# Altium PCB Main.PcbDoc (part 1 of 2)
Units mil, origin at the board's own origin, x right, y up, seen from the top; angles counter-clockwise.
Board outline 5000 x 4200 mil, 4 copper layers (Top Layer, Gnd 1, Power, Gnd 2), stack 62.4 mil thick; 162 components, 132 nets, 664 pads, 567 vias.
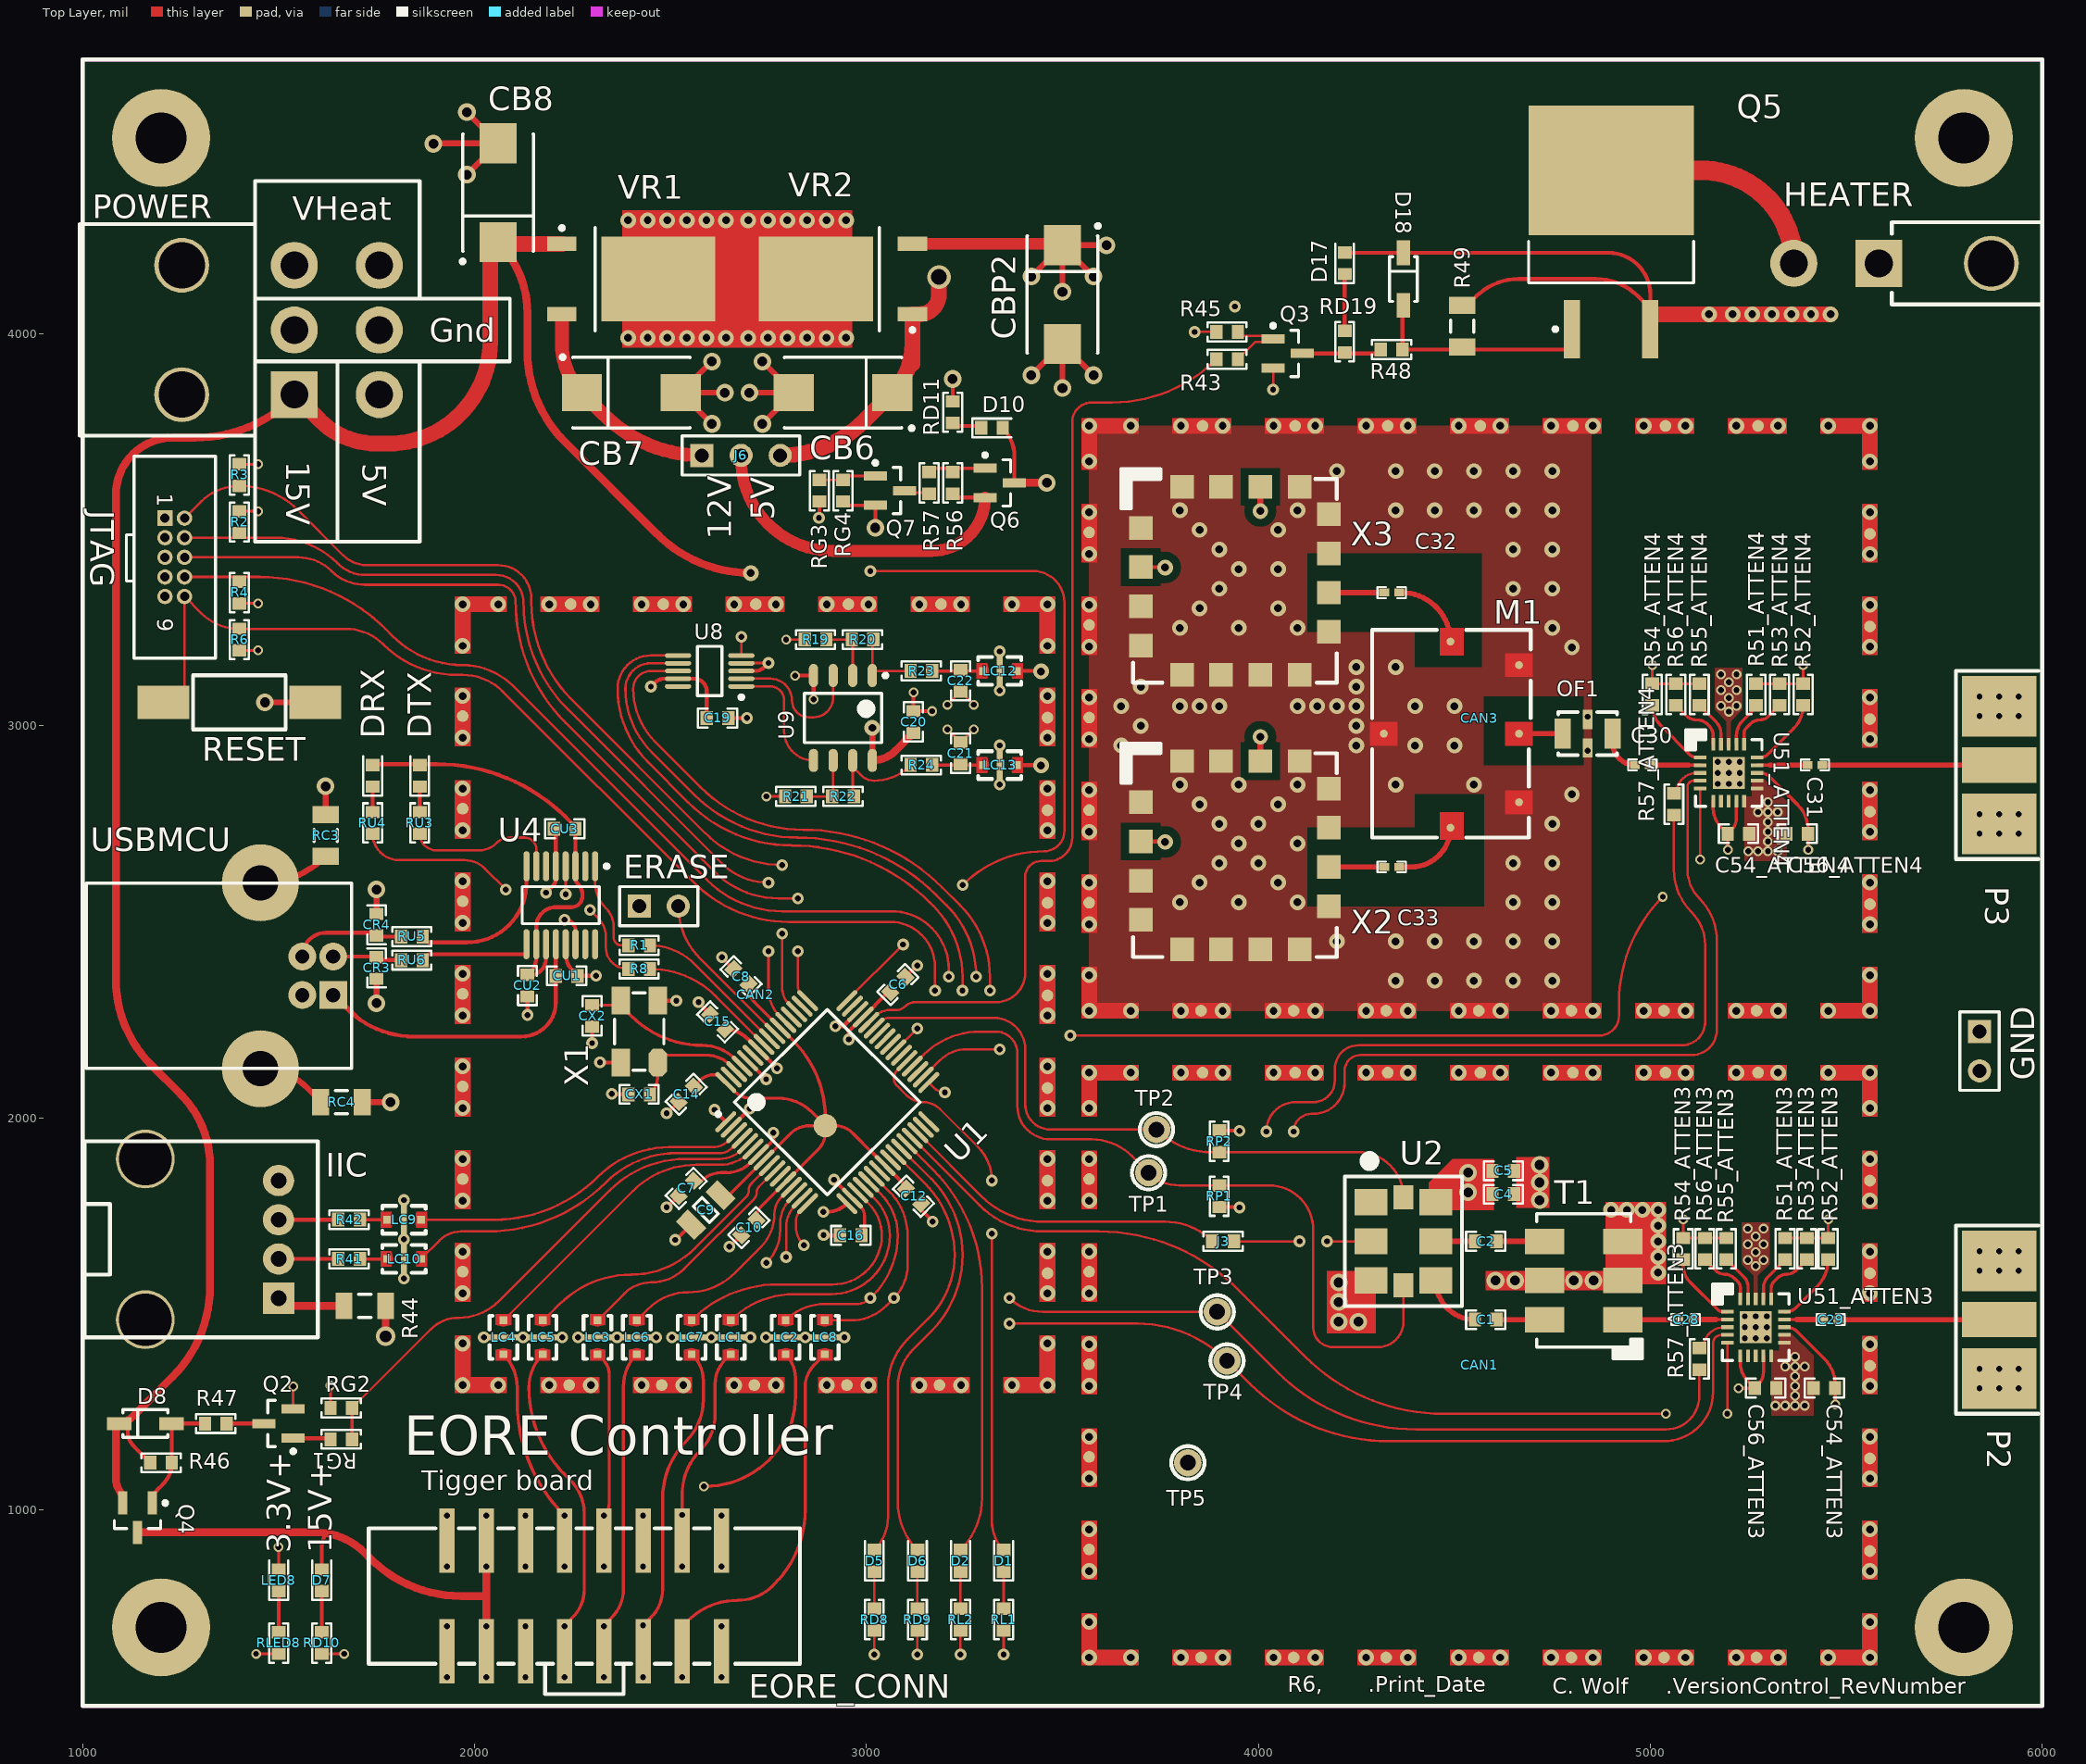
[diagram p0: Top Layer view]
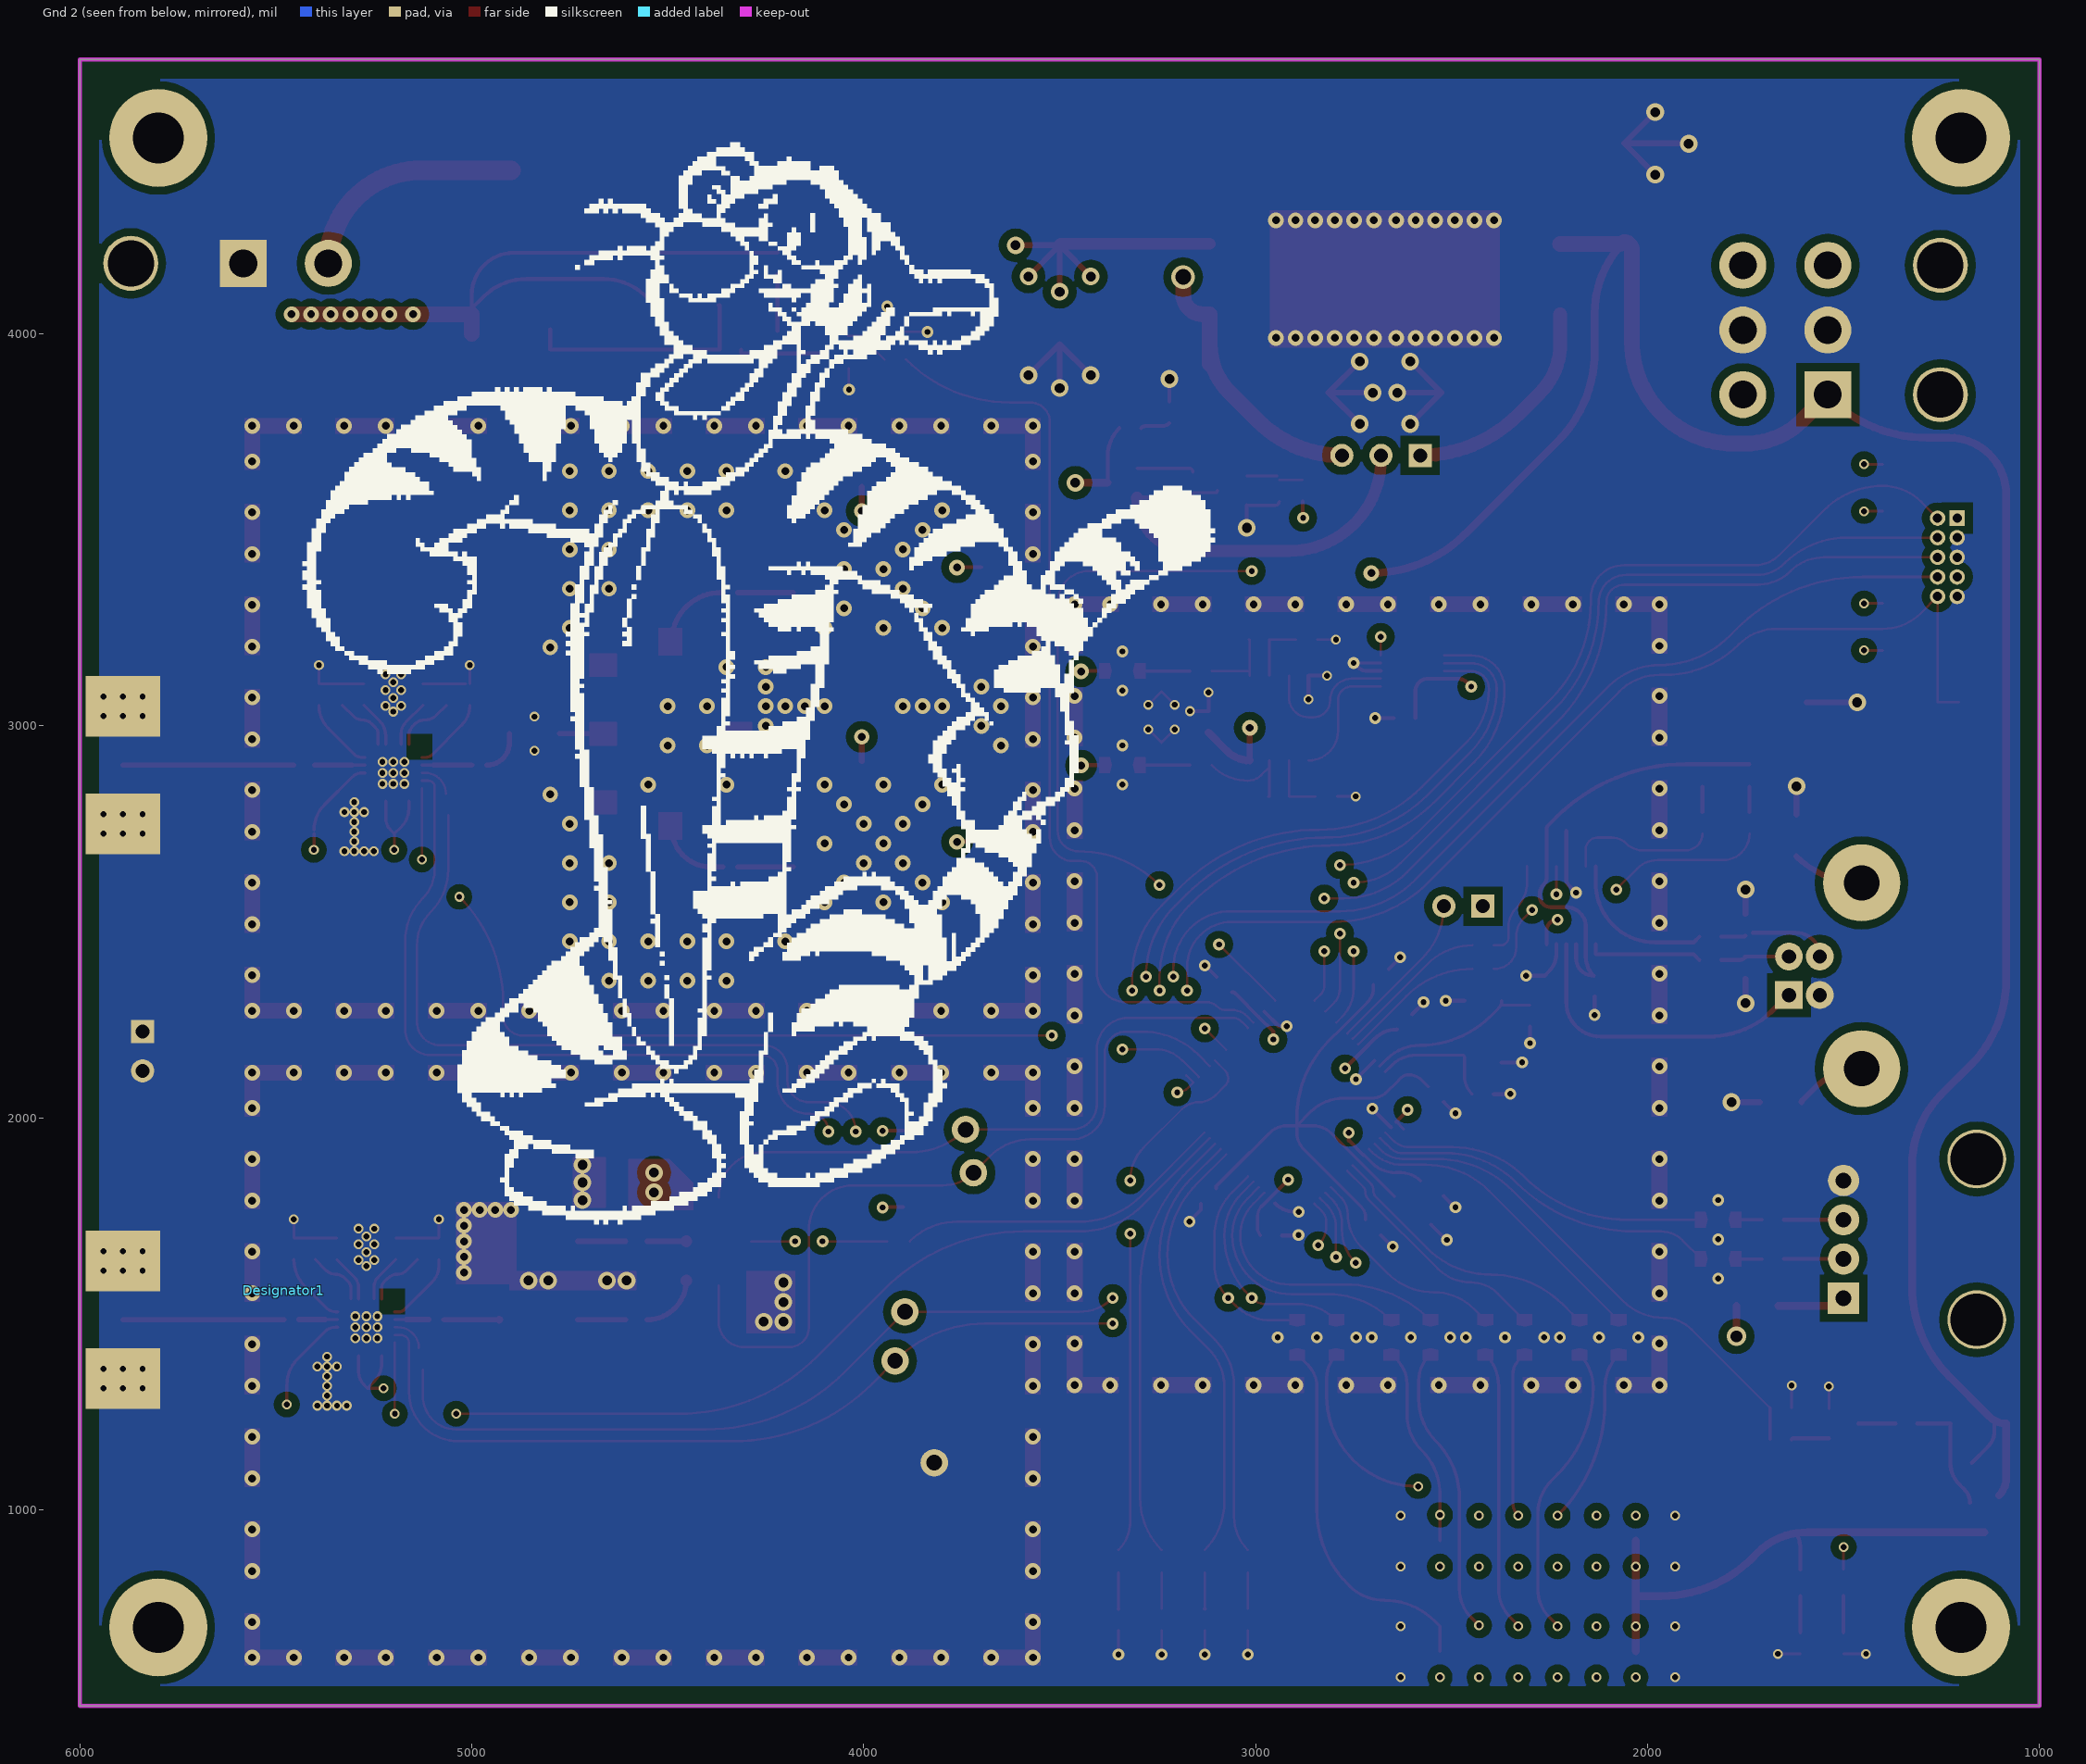
[diagram p1: Gnd 2 view, seen from below]
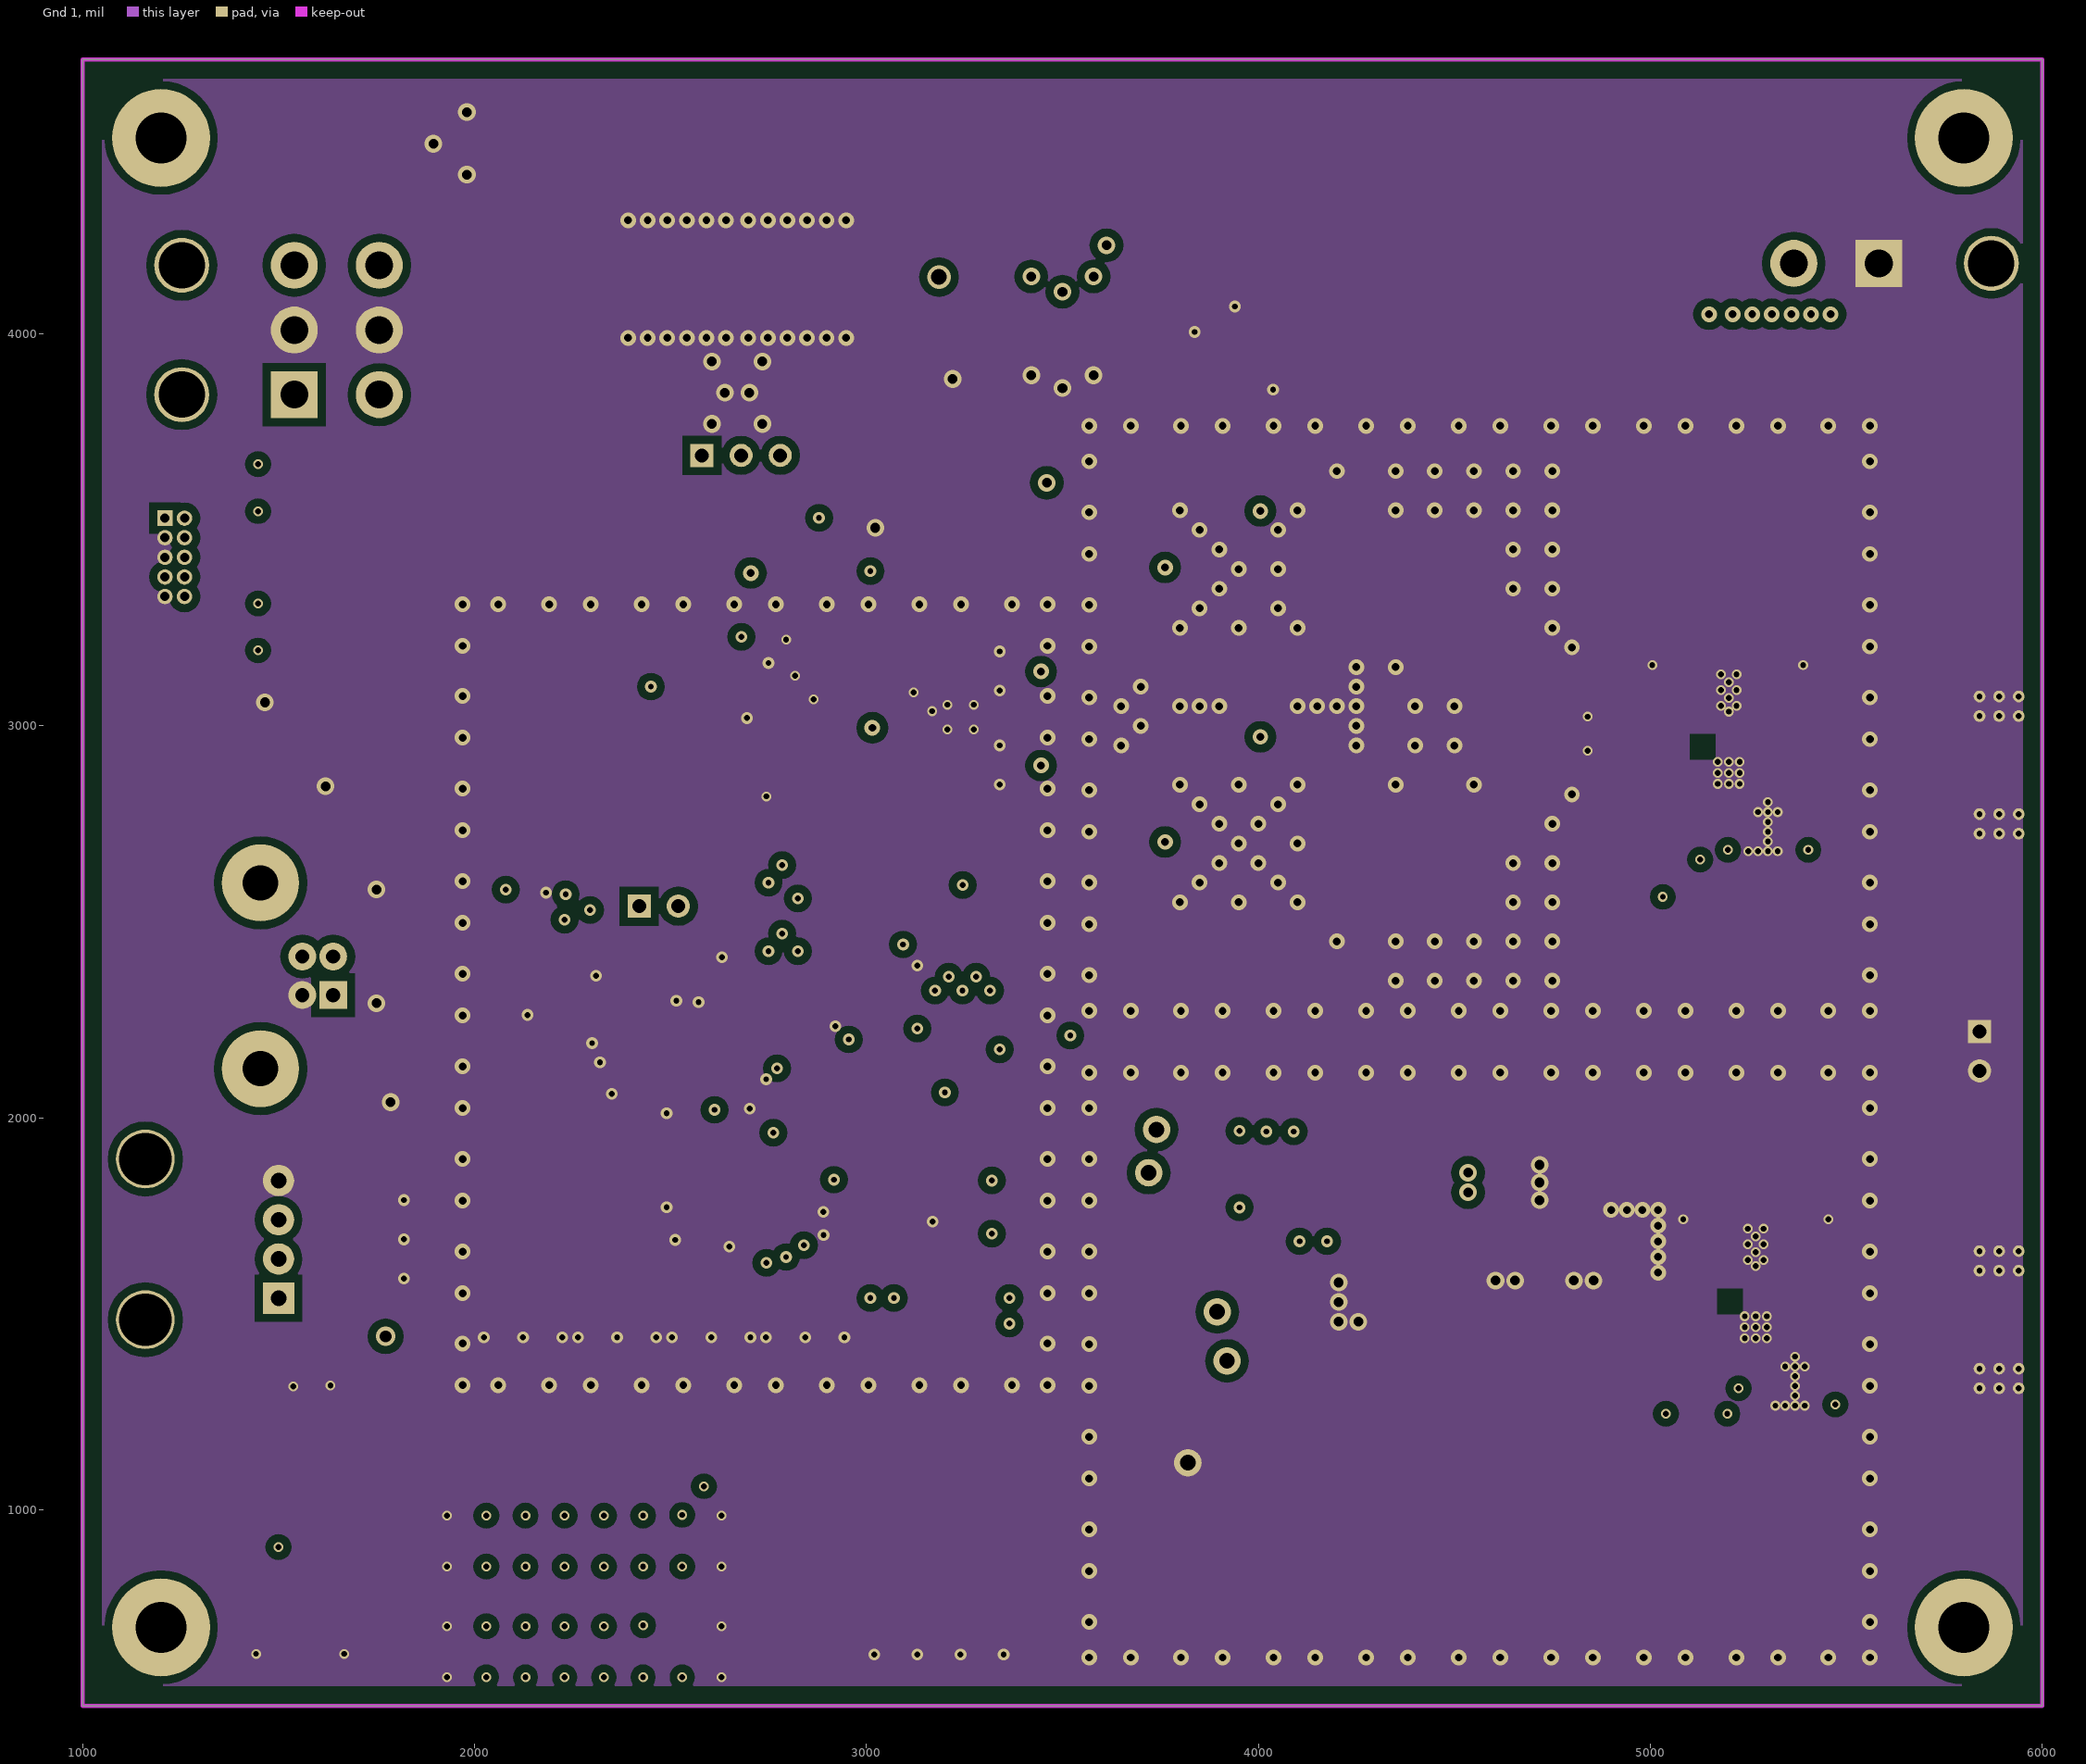
[diagram p2: Gnd 1]
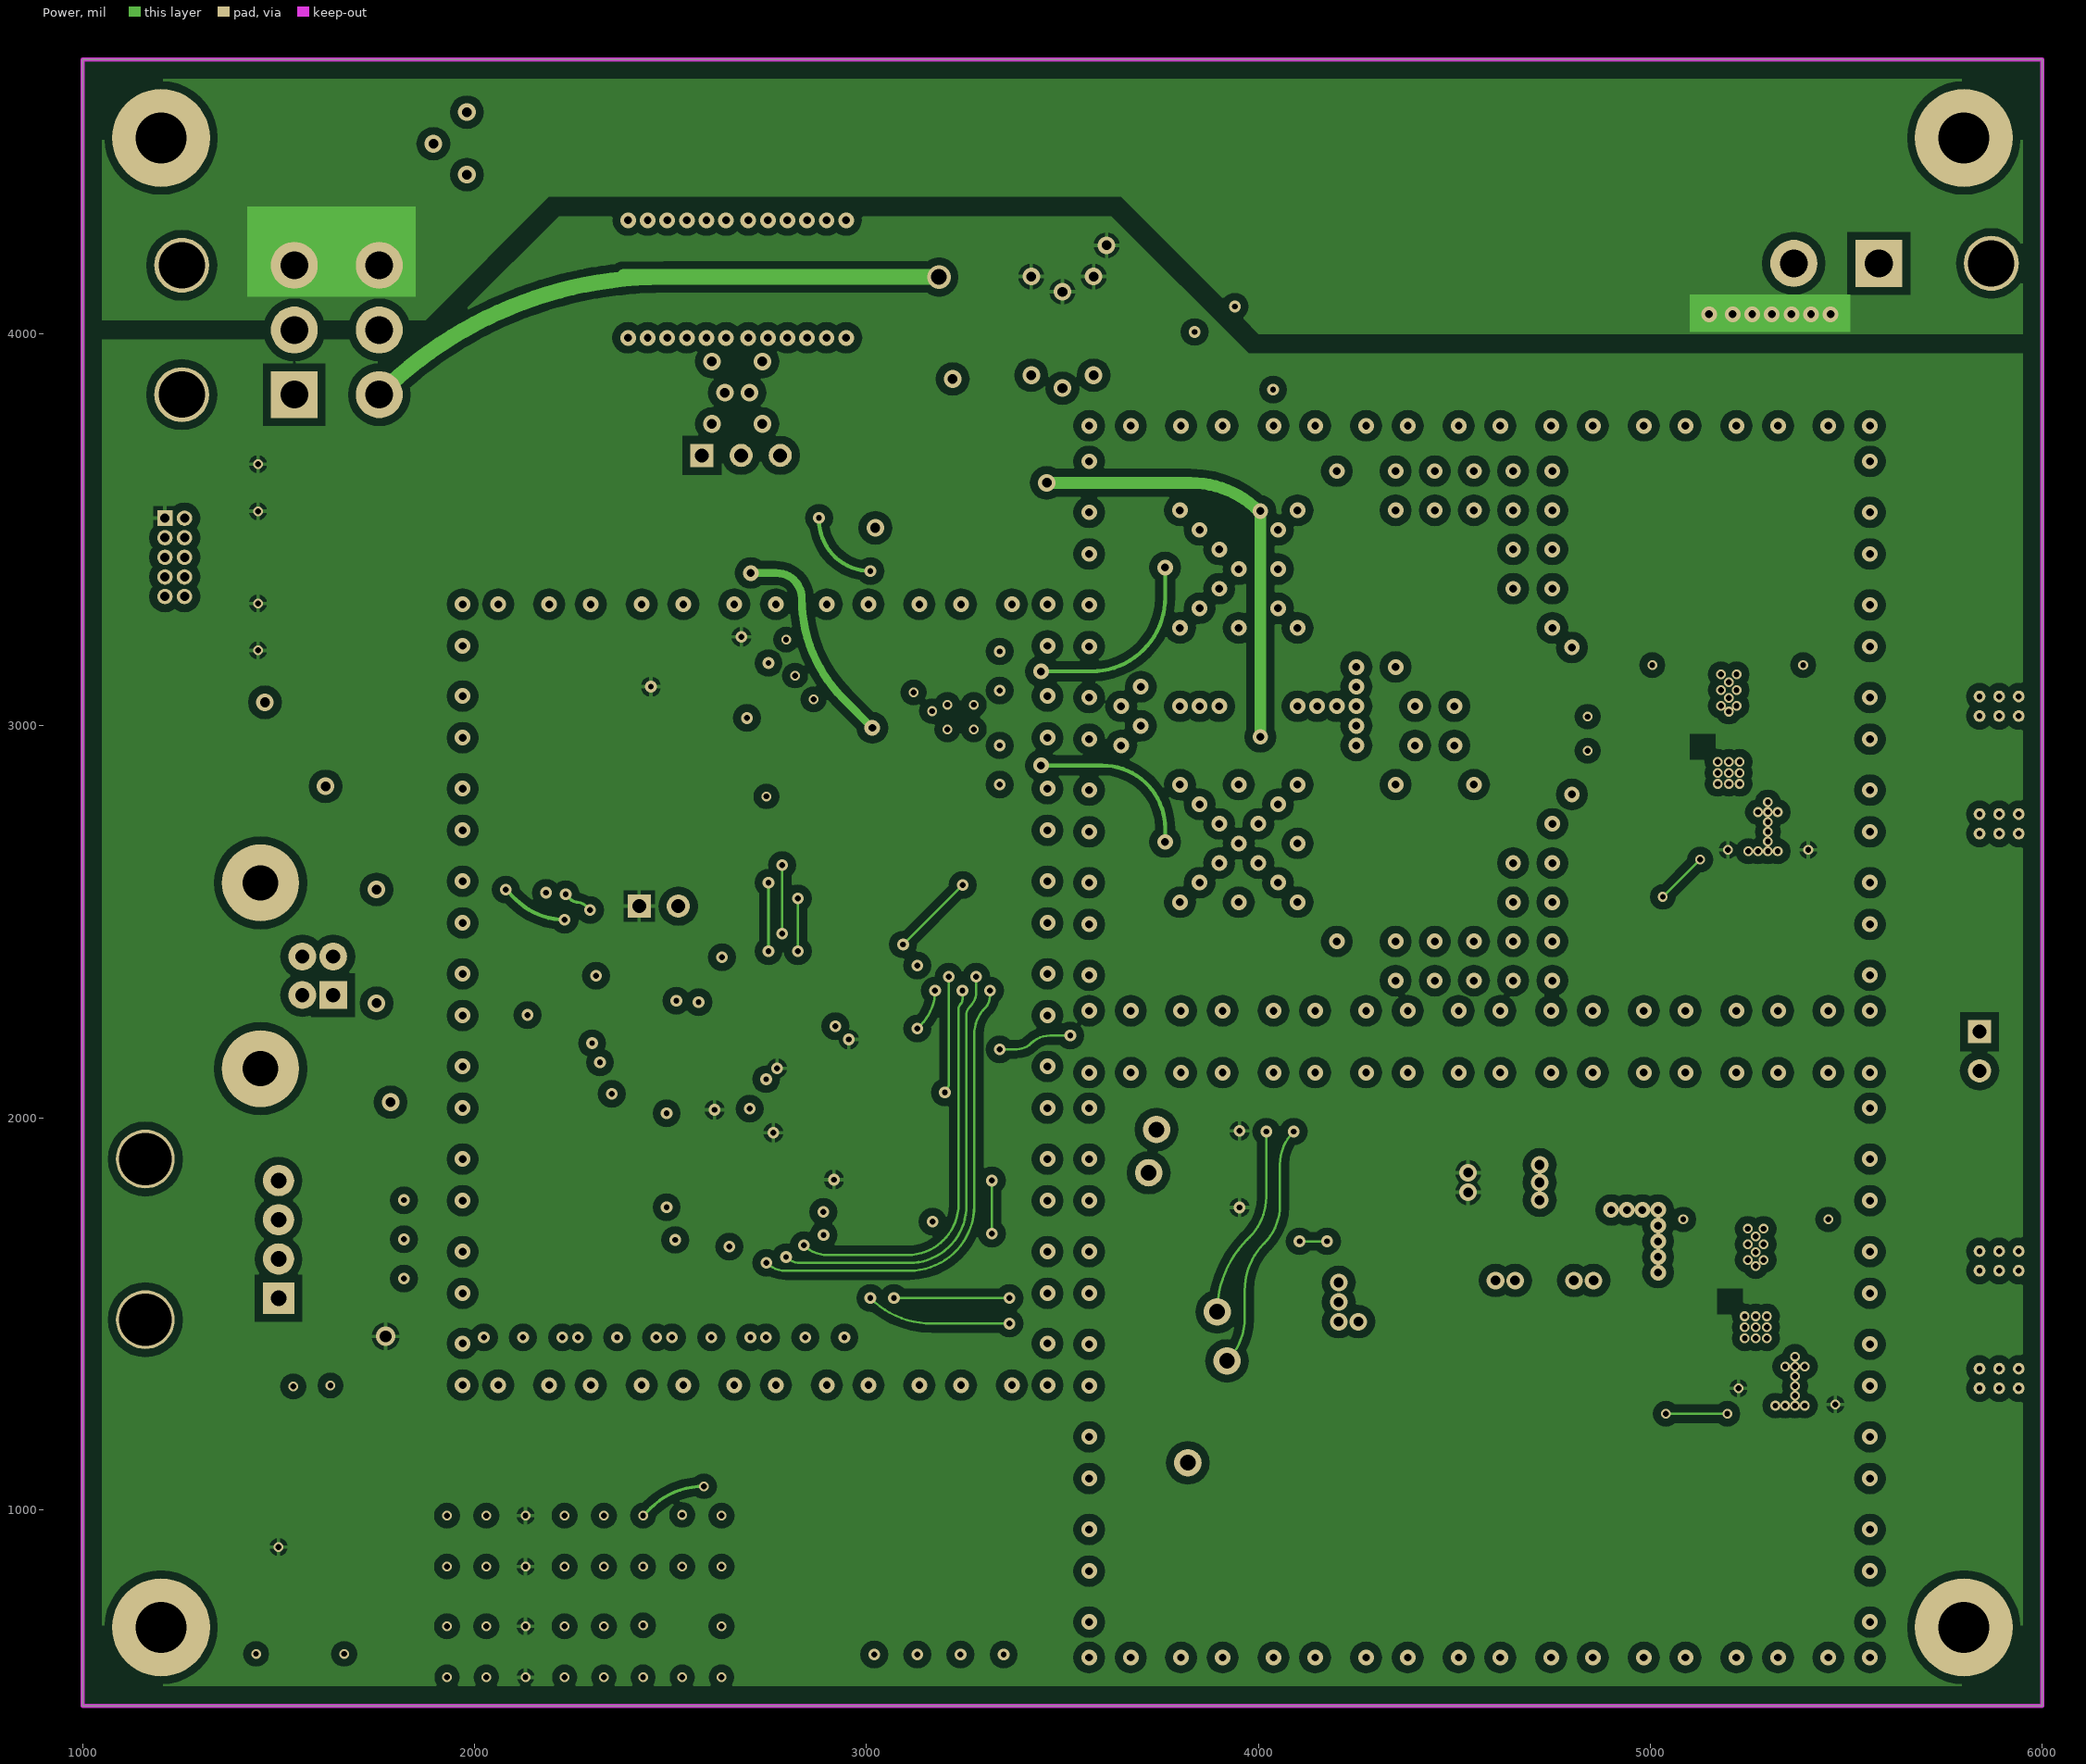
[diagram p3: Power]

## Layer stack, top to bottom
Top Layer: signal copper 1.4
Dielectric: prepreg 8.4, FR-4, Dk 4.8
Gnd 1: signal copper 1.4
Dielectric: core 40, FR-4, Dk 4.8
Power: signal copper 1.4
Dielectric: prepreg 8.4, FR-4, Dk 4.8
Gnd 2: signal copper 1.4

## Board outline
1000,500 1000,4700 6000,4700 6000,500

## Design rules (kind name [scope] priority, off if disabled: settings)
Clearance "Clearance Top Polygon" [InPolygon vs OnLayer('TopLayer')] p1: gap=15
Clearance "Clearance Polygon inner layers and bottom" [InPolygon vs NOT OnLayer('Top Layer')] p2: gap=20
Clearance [All] p3: gap=7
DiffPairsRouting [All] p1: maxlimit=10 minlimit=10 mostfreqgap=10 maxuncoupledlength=500
FlightTimeFalling [All] p1: maximum=1.000n
FlightTimeRising [All] p1: maximum=1.000n
HoleSize [All] p1: absolutevalues=TRUE maxlimit=500 minlimit=1 maxpercent=80.000 minpercent=20.000
HoleSize Testpoint [All] p2: absolutevalues=TRUE maxlimit=100 minlimit=1 maxpercent=80.000 minpercent=20.000
HoleSize TestPointUsage [All] p3: absolutevalues=TRUE maxlimit=100 minlimit=1 maxpercent=80.000 minpercent=20.000
MinimumAnnularRing [All] p1: minimumring=5
MinimumSolderMaskSliver [All] p1 off: minsoldermaskwidth=10
MinimumSolderMaskSliver SilkscreenOverComponentPads [All] p2 off: minsoldermaskwidth=10
OvershootFalling [All] p1: maximum=330.0m
OvershootRising [All] p1: maximum=330.0m
ParallelSegment [All] p1 off: limit=10000 gap=10
PolygonConnect Heatsink [InNet('GND') vs InNet('GND')] p1: connectstyle=Direct reliefconductorwidth=10 reliefentries=4 polygonreliefangle="90 Angle" airgapwidth=10
PolygonConnect [All] p2: connectstyle=Relief reliefconductorwidth=10 reliefentries=4 polygonreliefangle="90 Angle" airgapwidth=10
RoomDefinition EORE [InComponentClass('EORE')] p1 off: confinementstyle=ConfineIn formatcopy=TRUE lockcomponents=FALSE outline 7480,6715 7845,6715 7845,6465 7480,6465
RoomDefinition SWEEP [InComponentClass('SWEEP')] p2 off: confinementstyle=ConfineIn formatcopy=TRUE lockcomponents=FALSE outline 9301.73,3025 16046.73,3025 16046.73,3735 9301.73,3735
RoomDefinition ATTEN4 [InComponentClass('ATTEN4')] p3 off: confinementstyle=ConfineIn formatcopy=TRUE lockcomponents=FALSE outline 7900,2517.56 14345,2517.56 14345,2867.56 7900,2867.56
RoomDefinition TONE [InComponentClass('TONE')] p4 off: confinementstyle=ConfineIn formatcopy=TRUE lockcomponents=FALSE outline 7175,6445 7725,6445 7725,6900 7175,6900
RoomDefinition TEMP [InComponentClass('TEMP')] p5 off: confinementstyle=ConfineIn formatcopy=TRUE lockcomponents=FALSE outline 7020,6300 8490,6300 8490,6920 7020,6920
RoomDefinition ATTEN3 [InComponentClass('ATTEN3')] p6 off: confinementstyle=ConfineIn formatcopy=TRUE lockcomponents=FALSE outline 7110,6375 8090,6375 8090,6705 7110,6705
RoomDefinition USB [InComponentClass('USB')] p7 off: confinementstyle=ConfineIn formatcopy=TRUE lockcomponents=FALSE outline 7025,6310 8055,6310 8055,6835 7025,6835
RoomDefinition Main [InComponentClass('Main')] p8 off: confinementstyle=ConfineIn formatcopy=TRUE lockcomponents=FALSE outline 7020,6260 8445,6260 8445,6965 7020,6965
RoutingVias [All] p1: holewidth=15 width=30 viastyle="Through Hole" minholewidth=15 minwidth=25 maxholewidth=250 maxwidth=500
SignalStimulus [All] p1: kind=2 level=0 starttime=10.00n stoptime=60.00n periodtime=100.00n
SilkToSilkClearance [All] p1 off: silktosilkclearance=10
SilkToSolderMaskClearance [IsPad] p1 off: minsilkscreentomaskgap=10 clearancetoexposedcopper=TRUE
SolderMaskExpansion [All] p1: expansion=4
SupplyNets [All] p1: voltage=3.300
UndershootFalling [All] p1: maximum=330.0m
UndershootRising [All] p1: maximum=330.0m
Width Width_General [All] p1: maxlimit=250 minlimit=6 preferedwidth=10
Width "Width Differential Pair" [(InDifferentialPairClass('All Differential Pairs'))] p2: maxlimit=31.8 minlimit=1.94 preferedwidth=5.4 toplayer_minwidth=15.8 toplayer_prefwidth=22.52 midlayer1_minwidth=3.62 midlayer1_maxwidth=7.77 midlayer2_minwidth=0 midlayer2_maxwidth=0 midlayer2_prefwidth=0 bottomlayer_maxwidth=5.3 bottomlayer_prefwidth=3.35 impedancedriven=TRUE minimp=80.000000 maximp=100.000000 favimp=90.000000
23 further rules are at their usual default settings.

## Classes and differential pairs
component class TONE: C1 C2 C4 C5 C28 C29 GND J3 T1 U2
component class TEMP: D17 D18 HEATER IIC LC9 LC10 Q3 Q5 R41 R42 R43 R44 R45 R48 R49 RD19
component class Main: CAN1 CAN2 CAN3 CB6 CB7 CB8 CBP2 LED8 P2 P3 POWER RLED8 RP1 RP2 VR1 VR2
component class USB: C6 C7 C8 C9 C10 C12 C14 C15 C16 CR3 CR4 CU1 CU2 CU3 CX1 CX2 D1 D2 D5 D6 DRX DTX ERASE JTAG R1 R2 R3 R4 R6 R8 RC3 RC4 RD8 RD9 RESET RL1 RL2 RU3 RU4 RU5 RU6 TP1 TP2 TP3 TP4 TP5 U1 U4 USBMCU X1
component class ATTEN3: C54_ATTEN3 C56_ATTEN3 R51_ATTEN3 R52_ATTEN3 R53_ATTEN3 R54_ATTEN3 R55_ATTEN3 R56_ATTEN3 R57_ATTEN3 U51_ATTEN3
component class EORE: D7 D8 EORE_CONN LC1 LC2 LC3 LC4 LC5 LC6 LC7 LC8 Q2 Q4 R46 R47 RD10 RG1 RG2
component class SWEEP: C19 C20 C21 C22 C30 C31 C32 C33 D10 J6 LC12 LC13 M1 OF1 Q6 Q7 R19 R20 R21 R22 R23 R24 R56 R57 RD11 RG3 RG4 U8 U9 X2 X3
component class ATTEN4: C54_ATTEN4 C56_ATTEN4 R51_ATTEN4 R52_ATTEN4 R53_ATTEN4 R54_ATTEN4 R55_ATTEN4 R56_ATTEN4 R57_ATTEN4 U51_ATTEN4
channel class Attenuator: ATTEN3 ATTEN4
differential pair USB: +USB_P -USB_N

## Components (designator, comment, footprint, x,y, rotation, side; value= is the part's Value field where it differs from the comment)
C1 "SMT Cap" 0603C 4580,1485 r0 top
C2 "SMT Cap" 0603C 4580,1685 r0 top
C4 "SMT Cap" 0603C 4625,1805 r180 top
C5 "SMT Cap" 0603C 4625,1865 r180 top
C6 "Cap Semi" 0603C 3080,2340 r225 top
C7 "Cap Semi" 0603C 2540,1820 r45 top
C8 "Cap Semi" 0603C 2680,2360 r315 top
C9 "Cap Semi" 1206C 2590,1765 r45 top
C10 "Cap Semi" 0603C 2700,1720 r45 top
C12 "Cap Semi" 0603C 3120,1800 r135 top
C14 "Cap Semi" 0603C 2540,2060 r45 top
C15 "Cap Semi" 0603C 2620,2245 r315 top
C16 "Cap Semi" 0603C 2960,1700 r0 top
C19 "Cap Semi" 0603C 2620,3020 r180 top
C20 "Cap Semi" 0603C 3120,3010 r270 top
C21 "Cap Semi" 0603C 3240,2930 r270 top
C22 "Cap Semi" 0603C 3240,3115 r90 top
C28 "Cap" 0402C 5090,1485 r0 top
C29 "Cap" 0402C 5460,1485 r0 top
C30 "Cap" 0402C 4980,2900 r0 top
C31 "Cap" 0402C 5420,2900 r0 top
C32 "Cap" 0402C 4340,3340 r0 top
C33 "Cap" 0402C 4340,2640 r0 top
C54_ATTEN3 "SMT Cap" 0603C 5444.02,1310.44 r0 top (schematic designator C54)
C54_ATTEN4 "SMT Cap" 0603C 5225,2725 r180 top (schematic designator C54)
C56_ATTEN3 "SMT Cap" 0603C 5294.02,1310.44 r180 top (schematic designator C56)
C56_ATTEN4 "SMT Cap" 0603C 5375,2725 r0 top (schematic designator C56)
CAN1 "EMI Shield" BMI-S-230-F 5580,2135 r180 top locked
CAN2 "EMI Shield" BMI-S-230-F 1950,3330 r270 top locked
CAN3 "EMI Shield" BMI-S-230-F 5580,3785 r180 top locked
CB6 "Cap Pol3" V 2940,3850 r180 top
CB7 "Cap Pol3" V 2400,3850 r0 top
CB8 "Cap Pol3" V 2060,4360 r90 top
CBP2 "100 uF" V 3500,4100 r270 top
CR3 "PGB1010603" 0603PG 1750,2382.44 r270 top
CR4 "PGB1010603" 0603PG 1750,2492.44 r90 top
CU1 "Cap Semi" 0603C 2235,2362.44 r180 top
CU2 "Cap Semi" 0603C 2135,2337.44 r90 top
CU3 "Cap Semi" 0603C 2230,2737.44 r0 top
CX1 "Cap Semi" 0603C 2420,2060 r0 top
CX2 "Cap Semi" 0603C 2300,2260 r90 top
D1 "LED0" "0603 SMT LED" 3350,870 r90 top
D2 "LED0" "0603 SMT LED" 3240,870 r90 top
D5 "LED0" "0603 SMT LED" 3020,870 r90 top
D6 "LED0" "0603 SMT LED" 3130,870 r90 top
D7 "LED0" "0603 SMT LED" 1610,820 r90 top
D8 "D Zener" SOD123/X.85 1160,1220 r0 top
D10 "LED0" "0603 SMT LED" 3320,3760 r0 top
D17 "LED0" "0603 SMT LED" 4220,4180 r90 top
D18 "D Zener" SOD123/X.85 4370,4140 r270 top
Designator1 "Comment" ? 5480,1560 r180 bottom
DRX "LED0" "0603 SMT LED" 1740,2872.44 r90 top
DTX "LED0" "0603 SMT LED" 1860,2872.44 r90 top
EORE_CONN "Header 8X2" "SMT 16-pin rectangular header" 2280,780 r0 top
ERASE "Header 2" HDR1X2 2420,2540 r0 top
GND "Jumper" HDR1X2 5840,2220 r270 top
HEATER "Header 2" "Molex Mini-Fit Jr 5569 - 2 Pin, RA" 5870,4180 r90 top
IIC "Header 4" "AMPModu MTE 4 Pin Right Angle PCB-Locking Connector" 1500,1540 r90 top
J3 "Jumper" 0603R 3910,1685 r180 top
J6 "Jumper" HDR1X3 2580,3690 r0 top
JTAG "JTAG" "MHDR2X5 - Shrouded" 1210,3330 r270 top
LC1 "MEM2012F" "MEM2012S LC Filter" 2653.78,1440 r90 top
LC2 "MEM2012F" "MEM2012S LC Filter" 2793.78,1440 r90 top
LC3 "MEM2012F" "MEM2012S LC Filter" 2313.78,1440 r270 top
LC4 "MEM2012F" "MEM2012S LC Filter" 2073.78,1440 r270 top
LC5 "MEM2012F" "MEM2012S LC Filter" 2173.78,1440 r90 top
LC6 "MEM2012F" "MEM2012S LC Filter" 2413.78,1440 r90 top
LC7 "MEM2012F" "MEM2012S LC Filter" 2553.78,1440 r270 top
LC8 "MEM2012F" "MEM2012S LC Filter" 2893.78,1440 r270 top
LC9 "MEM2012F" "MEM2012S LC Filter" 1820,1740 r180 top
LC10 "MEM2012F" "MEM2012S LC Filter" 1820,1640 r0 top
LC12 "MEM2012F" "MEM2012S LC Filter" 3340,3140 r0 top
LC13 "MEM2012F" "MEM2012S LC Filter" 3340,2900 r0 top
LED8 "LED0" "0603 SMT LED" 1500,820 r90 top
M1 "HJK-272MH+" TTT881 4320,2980 r90 top
OF1 "LFCN-xxx" FV1206 4840,2980 r0 top
P2 "COAX-M" "SMA Jack - PCB Edge - MultiSize" 5990,1485 r180 top
P3 "COAX-M" "SMA Jack - PCB Edge - MultiSize" 5990,2900 r180 top
POWER "Header 3X2A" "Molex Mini-Fit Jr 5569 - 6 Pin, RA" 1540,3680 r270 top
Q2 "MOSFET-N" SOT23-3N 1500,1220 r180 top
Q3 "MOSFET-N" SOT23-3N 4075,3950 r0 top
Q4 "SI2319CDS-T1-GE3CT-ND" SOT23-3N 1140,980 r270 top
Q5 "IRF4905STRLPBFCT-ND" TO254P1520-3_4N 4900,4260 r90 top
Q6 "SI2319CDS-T1-GE3CT-ND" SOT23-3N 3340,3620 r0 top
Q7 "MOSFET-N" SOT23-3N 3060,3600 r0 top
R1 "Res Semi" 0603R 2420,2440 r0 top
R2 "Res Semi" 0603R 1400,3520 r90 top
R3 "Res Semi" 0603R 1400,3640 r90 top
R4 "Res Semi" 0603R 1400,3340 r270 top
R6 "Res Semi" 0603R 1400,3220 r270 top
R8 "Res Semi" 0603R 2420,2380 r0 top
R19 "Res Semi" 0603R 2870,3220 r180 top
R20 "Res Semi" 0603R 2990,3220 r0 top
R21 "Res Semi" 0603R 2820,2820 r0 top
R22 "Res Semi" 0603R 2940,2820 r180 top
R23 "Res Semi" 0603R 3140,3140 r180 top
R24 "Res Semi" 0603R 3140,2900 r180 top
R41 "Res Semi" 0603R 1680,1640 r180 top
R42 "Res Semi" 0603R 1680,1740 r180 top
R43 "Res Semi" 0603R 3920,3935 r0 top
R44 "Res Semi" 1206R 1720,1520 r0 top
R45 "Res Semi" 0603R 3920,4005 r0 top
R46 "Res Semi" 0603R 1200,1120 r180 top
R47 "Res Semi Small" 0603R 1340,1220 r0 top
R48 "Res Semi Small" 0603R 4340,3960 r180 top
R49 "Res Semi" 1206R 4520,4020 r90 top
R51_ATTEN3 "RES Semi" 0603R 5344,1665.77 r90 top (schematic designator R51)
R51_ATTEN4 "RES Semi" 0603R 5270,3080 r90 top (schematic designator R51)
R52_ATTEN3 "RES Semi" 0603R 5454,1665.77 r90 top (schematic designator R52)
R52_ATTEN4 "RES Semi" 0603R 5390,3080 r90 top (schematic designator R52)
R53_ATTEN3 "RES Semi" 0603R 5399,1665.77 r90 top (schematic designator R53)
R53_ATTEN4 "RES Semi" 0603R 5330,3080 r90 top (schematic designator R53)
R54_ATTEN3 "RES Semi" 0603R 5084,1665.77 r90 top (schematic designator R54)
R54_ATTEN4 "RES Semi" 0603R 5005,3080 r90 top (schematic designator R54)
R55_ATTEN3 "RES Semi" 0603R 5194,1665.77 r90 top (schematic designator R55)
R55_ATTEN4 "RES Semi" 0603R 5125,3080 r90 top (schematic designator R55)
R56 "Res Semi" 0603R 3220,3620 r270 top
R56_ATTEN3 "RES Semi" 0603R 5139,1665.77 r90 top (schematic designator R56)
R56_ATTEN4 "RES Semi" 0603R 5065,3080 r90 top (schematic designator R56)
R57 "Res Semi Small" 0603R 3160,3620 r270 top
R57_ATTEN3 "RES Semi" 0603R 5125,1385 r270 top (schematic designator R57)
R57_ATTEN4 "RES Semi" 0603R 5060,2800 r270 top (schematic designator R57)
RC3 "Res Semi" 1206R 1620,2720 r270 top
RC4 "Res Semi" 1206R 1660,2040 r180 top
RD8 "Res Semi Small" 0603R 3020,720 r270 top
RD9 "Res Semi Small" 0603R 3130,720 r270 top
RD10 "Res Semi Small" 0603R 1610,660 r270 top
RD11 "Res Semi Small" 0603R 3220,3800 r90 top
RD19 "Res Semi Small" 0603R 4220,3980 r270 top
RESET "SW-PB" TL3302BF180QG/TR 1400,3060 r0 top
RG1 "Res Semi Small" 0603R 1660,1180 r180 top
RG2 "Res Semi Small" 0603R 1660,1260 r0 top
RG3 "Res Semi Small" 0603R 2880,3600 r90 top
RG4 "Res Semi Small" 0603R 2940,3600 r90 top
RL1 "Res Semi Small" 0603R 3350,720 r270 top
RL2 "Res Semi Small" 0603R 3240,720 r270 top
RLED8 "Res Semi Small" 0603R 1500,660 r270 top
RP1 "Res Semi" 0603R 3900,1800 r270 top
RP2 "Res Semi" 0603R 3900,1940 r90 top
RU3 "Res Semi Small" 0603R 1860,2752.44 r270 top
RU4 "Res Semi Small" 0603R 1740,2752.44 r270 top
RU5 "Res Semi Small" 0603R 1840,2462.44 r0 top
RU6 "Res Semi Small" 0603R 1840,2402.44 r0 top
T1 "ADT4-1WT" CD542 4830,1585 r90 top
TP1 "Loop Testpoint" "Pad - 70 * 40 mil" 3720,1860 r0 top
TP2 "Loop Testpoint" "Pad - 70 * 40 mil" 3740,1970 r0 top
TP3 "Loop Testpoint" "Pad - 70 * 40 mil" 3895,1505 r0 top
TP4 "Loop Testpoint" "Pad - 70 * 40 mil" 3920,1380 r0 top
TP5 "Loop Testpoint" "Pad - 70 * 40 mil" 3820,1120 r0 top
U1 "ATSAM4N8B" TSQFP50P1200X1200-64N 2900,2040 r45 top
U2 "SI57x" SI57x 4370,1685 r270 top
U4 "FT230X" SOP635P600-16AN 2220,2542.44 r270 top
U8 "DAC856[2/3]" TSSOP50P490-10AN 2600,3140 r180 top
U9 "LM7332" SOIC127P600-8CN 2940,3020 r270 top
U51_ATTEN3 "DAT-31R5-SP" QFN50P400X400X90_HS-21N 5269,1465.77 r0 top (schematic designator U51)
U51_ATTEN4 "DAT-31R5-SP" QFN50P400X400X90_HS-21N 5200,2880 r0 top (schematic designator U51)
USBMCU "USB B Connector" "USB Connector (type B)" 1600,2362.44 r270 top
VR1 "L78M12" TO228P1000-3_4N 2400,4140 r0 top
VR2 "LF33CDT" TO228P1000-3_4N 2940,4140 r180 top
X1 "CTX819CT-ND" "Abracon ABM3B Crystal" 2420,2220 r90 top
X2 "ROS-3200-419+" CK605 3700,2805 r270 top
X3 "ROS-3200-419+" CK605 3700,3505 r270 top

## Footprints (in the part's own frame and the unit in brackets; to place one, negate y for a bottom-side part, rotate by r counter-clockwise, add the part's x,y. Pads: shape width x height; smd on the part's side, far side on the other; paste and mask are expansions set on the pad)
0402C [mil]
  rect 25x20 smd: 1(-19.02,0) 2(19.02,0)
  silkscreen extent -36,-14 36,14, body extent -36,-14 36,14
"0603 SMT LED" [mm]
  rect 0.8x0.9 smd: 1(0.7,0) 2(-0.7,0)
  silkscreen extent -1.27,-0.61 1.27,0.61, body extent -0.87,-0.48 0.87,0.48, height 1.3
0603C [mm] "0603 Size Capacitor"
  rect 0.8x0.9 smd: 1(-0.7,0) 2(0.7,0)
  silkscreen extent -1.27,-0.61 1.27,0.61, body extent -0.87,-0.48 0.87,0.48, height 1.3
0603PG [mm]
  rect 0.8x0.9 smd: 1(-0.7,0) 2(0.7,0)
  silkscreen extent -1.27,-0.61 1.27,0.61, body extent -0.87,-0.48 0.87,0.48, height 1.3
0603R [mm]
  rect 0.8x0.9 smd: 1(-0.7,0) 2(0.7,0)
  silkscreen extent -1.27,-0.61 1.27,0.61, body extent -0.87,-0.48 0.87,0.48, height 1.3
1206C [mm] "1206 Chip Capacitor"
  rect 1.1x1.7 smd: 1(-1.35,0) 2(1.35,0)
  silkscreen extent -0.4,-0.75 0.4,0.75, body extent -1.7,-0.9 1.7,0.9, height 1.3
1206R [mm] "1206 Chip Resistor"
  rect 1.1x1.7 smd: 1(-1.35,0) 2(1.35,0)
  silkscreen extent -0.4,-0.75 0.4,0.75, body extent -1.7,-0.9 1.7,0.9, height 1.3
"Abracon ABM3B Crystal" [mm] "Abracon ABM3B Quartz Crystal"
  oct 1.8x1.2 smd: 1(-2,-1.2)
  rect 1.8x1.2 smd: 2(2,-1.2) 3(2,1.2) 4(-2,1.2)
  silkscreen extent -2.5,-1.6 2.5,1.6, body extent -2.5,-1.6 2.5,1.6, height 2.54
"AMPModu MTE 4 Pin Right Angle PCB-Locking Connector" [mil] "AMPModu MTE 4 Pin Right Angle PCB-Locking Connector"
  round 150 hole 134: 0(-55,340) 0(355,340)
  rect 80x80 hole 40: 1(0,0)
  round 80 hole 40: 2(100,0) 3(200,0) 4(300,0)
  silkscreen extent -100,-100 400,495, body extent -105,-105 405,500, height 150
BMI-S-230-F [mil] "Laird BMI-S-230-F EMI Shield"
  round 30 smd: 1(19.69,1240.16) 1(19.69,1003.94) 1(19.69,767.72) 1(19.69,531.5) 1(19.69,295.28) 1(20,25) 1(25,1511.5) 1(305.12,19.68) 1(309.06,1511.81) 1(541.34,19.69) 1(545.28,1511.81) 1(777.56,19.69) 1(781.5,1511.81) 1(1013.78,19.69) 1(1017.72,1511.81) 1(1250,19.69) 1(1253.94,1511.81) 1(1486.22,19.69) 1(1490.16,1511.81) 1(1722.44,19.69) 1(1726.38,1511.81) 1(2006.5,20) 1(2011.5,1506.5) 1(2011.81,1000) 1(2011.81,1236.22) 1(2011.81,291.34) 1(2011.81,527.56) 1(2011.81,763.78)
  Top Layer region: 0,218.5 39.37,218.5 39.37,348.43 0,348.43
  Top Layer region: 232.28,0 381.89,0 381.89,39.37 232.28,39.37
  Top Layer region: 468.5,0 468.5,39.37 618.11,39.37 618.11,0
  Top Layer region: 704.72,0 854.33,0 854.33,39.37 704.72,39.37
  Top Layer region: 940.95,0 940.95,39.37 1090.55,39.37 1090.55,0
  Top Layer region: 1177.17,0 1326.77,0 1326.77,39.37 1177.17,39.37
  Top Layer region: 1413.39,0 1413.39,39.37 1562.99,39.37 1562.99,0
  Top Layer region: 1649.61,0 1799.21,0 1799.21,39.37 1649.61,39.37
  Top Layer region: 1885.83,0 2031.5,0 2031.5,131.89 1992.13,131.89 1992.13,39.37 1885.83,39.37
  Top Layer region: 1992.13,218.5 2031.5,218.5 2031.5,368.11 1992.13,368.11
  Top Layer region: 1992.13,454.72 2031.5,454.72 2031.5,604.33 1992.13,604.33
  Top Layer region: 1992.13,690.95 2031.5,690.95 2031.5,840.55 1992.13,840.55
  Top Layer region: 1992.13,927.17 2031.5,927.17 2031.5,1076.77 1992.13,1076.77
  Top Layer region: 1992.13,1163.39 2031.5,1163.39 2031.5,1312.99 1992.13,1312.99
  Top Layer region: 1885.83,1492.13 1885.83,1531.5 2031.5,1531.5 2031.5,1399.61 1992.13,1399.61 1992.13,1492.13
  Top Layer region: 1649.61,1492.13 1799.21,1492.13 1799.21,1531.5 1649.61,1531.5
  Top Layer region: 1413.39,1492.13 1562.99,1492.13 1562.99,1531.5 1413.39,1531.5
  Top Layer region: 1177.17,1492.13 1326.77,1492.13 1326.77,1531.5 1177.17,1531.5
  Top Layer region: 940.95,1492.13 1090.55,1492.13 1090.55,1531.5 940.95,1531.5
  Top Layer region: 704.72,1492.13 704.72,1531.5 854.33,1531.5 854.33,1492.13
  Top Layer region: 468.5,1492.13 618.11,1492.13 618.11,1531.5 468.5,1531.5
  Top Layer region: 232.28,1492.13 381.89,1492.13 381.89,1531.5 232.28,1531.5
  Top Layer region: 0,1399.61 0,1531.5 145.67,1531.5 145.67,1492.13 39.37,1492.13 39.37,1399.61
  Top Layer region: 0,1163.39 0,1312.99 39.37,1312.99 39.37,1163.39
  Top Layer region: 0,927.17 0,1076.77 39.37,1076.77 39.37,927.17
  Top Layer region: 0,690.95 0,840.55 39.37,840.55 39.37,690.95
  Top Layer region: 0,454.72 0,604.33 39.37,604.33 39.37,454.72
  Top Layer region: 0,218.5 0,368.11 39.37,368.11 39.37,218.5
  Top Layer region: 0,0 0,131.89 39.37,131.89 39.37,39.37 145.67,39.37 145.67,0
  body extent 0,0 2031,1531, height 236
CD542 [mm] "Mini-Circuits CD542 Package"
  rect 1.65x2.54 smd paste-0.1: 1(-2.54,-2.54) 2(0,-2.54) 3(2.54,-2.54) 4(2.54,2.54) 5(0,2.54) 6(-2.54,2.54)
  silkscreen extent -5.08,-3.81 4.32,3.05, body extent -3.94,-2.79 3.94,2.79, height 3
CK605 [mil] "Mini-Circuits CK605 Package"
  rect 60x60 smd: 1(0,0) 2(100,0) 3(200,0) 4(300,0) 5(375,105) 6(375,205) 7(375,305) 8(375,405) 9(265,480) 10(165,480) 11(65,480) 12(-35,480) 13(-105,405) 14(-105,305) 15(-105,205) 16(-105,105)
  silkscreen extent -150,-50 395,500, body extent -105,0 375,480, height 180
FV1206 [mil] "Mini-Circuits LTCC SMT Chip-Filter"
  rect 41x77 smd: 1(-64,0) 3(64,0)
  rect 24x49 smd: 2(0,-36.5) 4(0,36.5)
  silkscreen extent -75,-55 75,55
HDR1X2 [mm] "Connector; Header; 2 Position"
  rect 1.5x1.5 hole 0.9: 1(0,0)
  round 1.5 hole 0.9: 2(2.54,0)
  silkscreen extent -1.27,-1.27 3.81,1.27, body extent -1.27,-1.27 3.81,1.27, height 6.35
HDR1X3 [mm] "Connector; Header; 3 Position"
  rect 1.5x1.5 hole 0.9: 1(0,0)
  round 1.5 hole 0.9: 2(2.54,0) 3(5.08,0)
  silkscreen extent -1.27,-1.27 6.35,1.27
"MEM2012S LC Filter" [mm] "MEM2012S TDK LC Filter"
  rect 0.5x0.5 smd: 1(-1.1,0) 3(1.1,0)
  rect 0.4x2 smd: 2(0,0)
  Top Layer region: 1.5,0.5 1.5,-0.5 0.8,-0.5 0.7,0 0.8,0.5
  Top Layer region: -1.5,-0.5 -1.5,0.5 -0.8,0.5 -0.7,0 -0.8,-0.5
  silkscreen extent -1.4,-0.9 1.4,0.9, body extent -1.4,-0.7 1.4,0.7, height 0.85
"MHDR2X5 - Shrouded" [mm] "Connector; Header; 5x2 Position"
  rect 1x1 hole 0.6: 1(-5.08,0)
  round 1 hole 0.6: 2(-5.08,1.27) 3(-3.81,0) 4(-3.81,1.27) 5(-2.54,0) 6(-2.54,1.27) 7(-1.27,0) 8(-1.27,1.27) 9(0,0) 10(0,1.27)
  silkscreen extent -9.08,-2.5 4,3.27, body extent -9.08,-2 4,3.27, height 5.4
"Molex Mini-Fit Jr 5569 - 2 Pin, RA" [mil] "Molex Mini-Fit Jr 5569 - 2 Pin Right Angle ( 39-30-1021 )( WM1363-ND )"
  round 140 hole 118: 0(0,0)
  rect 120x120 hole 71: 1(0,287)
  round 120 hole 71: 2(0,504)
  silkscreen extent -105,-130 105,254, body extent -104,-260 124,525, height 449
"Molex Mini-Fit Jr 5569 - 6 Pin, RA" [mil] "Molex Mini-Fit Jr 5569 - 6 Pin Right Angle ( 39-30-106(1/2) ) ( WM21365-ND )"
  round 140 hole 118: 0(-495,-287) 0(-165,-287)
  rect 120x120 hole 71: 1(-165,0)
  round 120 hole 71: 2(-330,0) 3(-495,0) 4(-165,217) 5(-330,217) 6(-495,217)
  silkscreen extent -600,-547 -60,-100, body extent -603,-547 -44,237, height 449
"Pad - 70 * 40 mil" [mil]
  round 70 hole 40: 1(0,0)
  silkscreen extent -42,-42 42,42, body extent -40,-40 40,40
QFN50P400X400X90_HS-21N [mm] "QFN, 20-Leads, Body 4.00x4.00mm, Pitch 0.50mm, Thermal Pad 2.06x2.06mm, IPC Medium Density"
  rect 0.635x0.635 on Keep-Out paste-0.1: 0(-1.676,1.676)
  rect 0.81x0.25 smd: 1(-1.845,1) 2(-1.845,0.5) 3(-1.845,0) 4(-1.845,-0.5) 5(-1.845,-1) 11(1.845,-1) 12(1.845,-0.5) 13(1.845,0) 14(1.845,0.5) 15(1.845,1)
  rect 0.25x0.81 smd: 6(-1,-1.845) 7(-0.5,-1.845) 8(0,-1.845) 9(0.5,-1.845) 10(1,-1.845) 16(1,1.845) 17(0.5,1.845) 18(0,1.845) 19(-0.5,1.845) 20(-1,1.845)
  rect 2.06x2.06 smd: 21(0,0)
  silkscreen extent -2.79,-2.15 2.15,2.79, body extent -2,-2 2,2, height 0.9
SI57x [mm] "Silicon Labs Programmable Oscillator"
  rect 1.7x2.15 smd: 1(-2.54,-2.1) 2(0,-2.1) 3(2.54,-2.1) 4(2.54,2.1) 5(0,2.1) 6(-2.54,2.1)
  rect 1.545x1.3 smd: 7(-2.852,0) 8(2.852,0)
  silkscreen extent -5.34,-3.8 4.2,3.8, body extent -4.2,-3.8 4.2,3.8, height 1.8
"SMA Jack - PCB Edge - MultiSize" [mil] "SMA Jack - PCB Edge - MultiSize"
  rect 190x90 smd: 1(100,0)
  round 30 hole 15: 2(50,175) 2(50,125) 2(50,-125) 2(50,-175) 2(100,175) 2(100,125) 2(100,-125) 2(100,-175) 2(150,125) 2(150,175) 2(150,-175) 2(150,-125)
  rect 190x155 smd: 2(100,150) 2(100,-150)
  rect 190x155 smd far side: 2(100,150) 2(100,-150)
  silkscreen extent 0,-240 210,240, body extent -5,-245 215,245, height 180
"SMT 16-pin rectangular header" [mil]
  rect 39x164 smd: 1(-350,-141) 2(-350,141) 3(-250,-141) 4(-250,141) 5(-150,-141) 6(-150,141) 7(-50,-141) 8(-50,141) 9(50,-141) 10(50,141) 11(150,-141) 12(150,141) 13(250,-141) 14(250,141) 15(350,-141) 16(350,141)
  silkscreen extent -550,-250 550,173, body extent -550,-189 550,185, height 413
SOD123/X.85 [mm] "SOD-123; 2 Leads; Body 2.7 x 1.6 mm, (LxW)"
  rect 1.6x0.85 smd: 1(-1.7,0) 2(1.7,0)
  silkscreen extent -1.45,-0.9 1.45,0.9
SOIC127P600-8CN [mm] "SOIC, 8-Leads, Body 4.9x3.9mm, Pitch 1.27mm, IPC Medium Density"
  oval 1.5x0.6 smd: 1(-2.75,1.905) 2(-2.75,0.635) 3(-2.75,-0.635) 4(-2.75,-1.905) 5(2.75,-1.905) 6(2.75,-0.635) 7(2.75,0.635) 8(2.75,1.905)
  silkscreen extent -2.87,-2.5 1.6,2.88, body extent -3.01,-2.5 3.01,2.5, height 1.75
SOP635P600-16AN [mm] "SOP, 16-Leads, Body 4.9x3.9mm, Pitch 0.635mm, IPC Medium Density"
  oval 1.95x0.4 smd: 1(-2.525,2.222) 2(-2.525,1.587) 3(-2.525,0.952) 4(-2.525,0.317) 5(-2.525,-0.318) 6(-2.525,-0.953) 7(-2.525,-1.588) 8(-2.525,-2.223) 9(2.525,-2.222) 10(2.525,-1.587) 11(2.525,-0.952) 12(2.525,-0.317) 13(2.525,0.318) 14(2.525,0.953) 15(2.525,1.588) 16(2.525,2.223)
  silkscreen extent -2.65,-2.5 1.2,3.1, body extent -1.99,-2.5 1.99,2.5, height 1.76
SOT23-3N [mm] "SOT23, 3-Leads, Body 2.9x1.3mm, Pitch 0.95mm, Lead Span 2.5mm, IPC Medium Density"
  rect 1.5x0.6 smd: 1(-0.95,0.95) 2(-0.95,-0.95) 3(0.95,0)
  silkscreen extent -1.08,-1.5 0.7,1.92, body extent -0.7,-1.5 0.7,1.5, height 1.1
TL3302BF180QG/TR [mm] "SMT Push-Button NO Tactile Switch"
  rect 3.35x2.16 smd: 1(-4.925,0) 2(4.925,0)
  silkscreen extent -3,-1.75 3,1.75, body extent -3,-1.75 3,1.75, height 5
TO228P1000-3_4N [mm] "D-PAK, 4-Leads, Body 6.2x6.5mm, Pitch 2.28mm, Lead Span 9.9mm, IPC Medium Density"
  rect 1.9x0.95 smd: 1(-4.5,2.28) 3(-4.5,-2.28)
  rect 7.4x5.5 smd: 4(1.75,0)
  silkscreen extent -4.62,-3.35 -2.35,3.43, body extent -2.25,-3.37 4.1,3.37, height 2.39
TO254P1520-3_4N [mm] "D2-PAK, 4-Leads, Body 9x10.2mm, Pitch 2.54mm, Lead Span 15.2mm, IPC Medium Density"
  rect 3.8x1.05 smd: 1(-6.3,2.54) 3(-6.3,-2.54)
  rect 8.4x10.7 smd: 4(4,0)
  silkscreen extent -6.42,-5.35 -0.6,5.35, body extent -3.3,-5.33 6.35,5.33, height 4.83
TSQFP50P1200X1200-64N [mm] "Thin QFP, 64-Leads, Body 10x10mm, Pitch 0.5mm, IPC Medium Density"
  oval 1.8x0.3 smd: 1(-5.55,3.75) 2(-5.55,3.25) 3(-5.55,2.75) 4(-5.55,2.25) 5(-5.55,1.75) 6(-5.55,1.25) 7(-5.55,0.75) 8(-5.55,0.25) 9(-5.55,-0.25) 10(-5.55,-0.75) 11(-5.55,-1.25) 12(-5.55,-1.75) 13(-5.55,-2.25) 14(-5.55,-2.75) 15(-5.55,-3.25) 16(-5.55,-3.75) 33(5.55,-3.75) 34(5.55,-3.25) 35(5.55,-2.75) 36(5.55,-2.25) 37(5.55,-1.75) 38(5.55,-1.25) 39(5.55,-0.75) 40(5.55,-0.25) 41(5.55,0.25) 42(5.55,0.75) 43(5.55,1.25) 44(5.55,1.75) 45(5.55,2.25) 46(5.55,2.75) 47(5.55,3.25) 48(5.55,3.75)
  oval 0.3x1.8 smd: 17(-3.75,-5.55) 18(-3.25,-5.55) 19(-2.75,-5.55) 20(-2.25,-5.55) 21(-1.75,-5.55) 22(-1.25,-5.55) 23(-0.75,-5.55) 24(-0.25,-5.55) 25(0.25,-5.55) 26(0.75,-5.55) 27(1.25,-5.55) 28(1.75,-5.55) 29(2.25,-5.55) 30(2.75,-5.55) 31(3.25,-5.55) 32(3.75,-5.55) 49(3.75,5.55) 50(3.25,5.55) 51(2.75,5.55) 52(2.25,5.55) 53(1.75,5.55) 54(1.25,5.55) 55(0.75,5.55) 56(0.25,5.55) 57(-0.25,5.55) 58(-0.75,5.55) 59(-1.25,5.55) 60(-1.75,5.55) 61(-2.25,5.55) 62(-2.75,5.55) 63(-3.25,5.55) 64(-3.75,5.55)
  silkscreen extent -5.67,-4.25 4.25,4.57, body extent -5,-5 5,5, height 1.6
TSSOP50P490-10AN [mm] "TSSOP, 10-Leads, Body 3x3mm, Pitch 0.5mm, IPC Medium Density"
  oval 1.7x0.3 smd: 1(-2.05,1) 2(-2.05,0.5) 3(-2.05,0) 4(-2.05,-0.5) 5(-2.05,-1) 6(2.05,-1) 7(2.05,-0.5) 8(2.05,0) 9(2.05,0.5) 10(2.05,1)
  silkscreen extent -2.17,-1.6 0.8,1.82, body extent -1.6,-1.6 1.6,1.6, height 1.1
TTT881 [mil] "Mini-Circuits TTT881 Package"
  round 20 smd: 1(235,-170) 2(-240,-170) 3(0,-345) 4(0,0) 5(-175,-345) 6(175,-345)
  Top Layer region: 200,-203 200,-143 270,-143 270,-203
  Top Layer region: 145,-380 145,-310 205,-310 205,-380
  Top Layer region: -30,-380 -30,-310 30,-310 30,-380
  Top Layer region: -205,-380 -205,-310 -145,-310 -145,-380
  Top Layer region: -270,-203 -270,-143 -200,-143 -200,-203
  Top Layer region: -30,-35 -30,35 30,35 30,-35
  silkscreen extent -265,-375 265,30, body extent -265,-375 265,30, height 230
"USB Connector (type B)" [mm] "USB-B right angle through hole connector (molex)"
  rect 1.8x1.8 hole 0.92: 1(1.25,1)
  round 1.8 hole 0.92: 2(-1.25,1) 3(-1.25,-1) 4(1.25,-1)
  round 5 hole 2.3: 5(-6.02,-3.71) 6(6.02,-3.71)
  silkscreen extent -6,-15 6,2.2, body extent -8.64,-15 8.64,2.2, height 11
V [mm] "Capacitor, SM Tantalum; Body 7.3 x 4.3 mm (LxW typ)"
  rect 2.6x2.4 smd: 1(-3.2,0) 2(3.2,0)
  silkscreen extent -4.58,-2.3 3.8,2.42, body extent -3.78,-2.16 3.52,2.14, height 4.15
? [mil]
  silkscreen extent 48,168 2376,2928, body extent 895,1385 1010,1670

## Part data
C1 C2 C4 C5 C54_ATTEN3 C54_ATTEN4 C56_ATTEN3 C56_ATTEN4: library part "Cap - SMT Small"
C6 C7 C8 C9 C10 C12 C14 C15 C16 C19 C20 C21 C22 CU1 CU2 CU3 CX1 CX2: "Capacitor (Semiconductor SIM Model)"
C28 C29 C30 C31 C32 C33: "Capacitor"
CAN1: library part "BMI-S-205-F RF/EMI Can", "Laird Technologies 2-part EMI can"
CAN2 CAN3: library part "BMI-S-230-F-R RF/EMI Can", "Laird Technologies 2-part EMI can"
CB6 CB7 CB8: "KEMET T520 KO-CAP  Polymer SMT Tantalum"
CBP2: library part "100 uf SMT Panasonic Cap"
CR3 CR4: "PulseGuard® Lead-Free 0603 Surface Mount Polymeric ESD Suppressors"
D1 D2 D5 D6 D7 D10 D17 DRX DTX LED8: "T 1 3/4 LED"
D8 D18: "Zener Diode"
EORE_CONN: "Header, 8-Pin, Dual row"
ERASE HEATER: "Header, 2-Pin"
GND J3: library part "Jumper - 2 Pin", "Jumper - 2-Pin"
IIC: "Header, 4-Pin"
J6: library part "Jumper - 3 Pin", "Jumper - 3-Pin"
JTAG: library part "ARM JTAG-10", "ARM 10-Pin JTAG Interface"
LC1 LC2 LC3 LC4 LC5 LC6 LC7 LC8 LC9 LC10 LC12 LC13: library part "MEM2012F - Signal Filter", "Signal Line 3-terminal Filters"
M1: "Wideband Frequency Mixer Level 13 (LO Power +13 dBm) 600 to 2700 MHz"
OF1: library part "LFCN-xxx Filter", "Ceramic Low Pass Filter"
P2 P3: "RF Coaxial PCB Connector, MMCX; Thru-Hole, Vertical Mount Plug,  50 Ohm Impedance"
POWER: "Header, 3-Pin, Dual row"
Q2 Q3 Q7: "N-Channel MOSFET"
Q4 Q5 Q6: library part MOSFET-P, "P-Channel MOSFET"
R1 R2 R3 R4 R6 R8 R19 R20 R21 R22 R23 R24 R41 R42 R43 R44 R45 R46 R47 R48 R49 R51_ATTEN3 R51_ATTEN4 R52_ATTEN3 R52_ATTEN4 R53_ATTEN3 R53_ATTEN4 R54_ATTEN3 R54_ATTEN4 R55_ATTEN3 R55_ATTEN4 R56 R56_ATTEN3 R56_ATTEN4 R57 R57_ATTEN3 R57_ATTEN4 RC3 RC4 RD8 RD9 RD10 RD11 RD19 RG1 RG2 RG3 RG4 RL1 RL2 RLED8 RP1 RP2 RU3 RU4 RU5 RU6: "Semiconductor Resistor"
RESET: "Switch"
T1: "Surface Mount RF Transformer"
TP1 TP2 TP3 TP4 TP5: library part Testpoint
U1: "32 bit Cortex M4 Microcontroller"
U2: library part SI570, "10 MHZ TO 1.4 GHZ I2C PROGRAMMABLE XO/VCXO"
U4: "USB To Basic Serial Bridge IC"
U8: "16-Bit, Dual, Low Power, Ultra-low Glitch, Buffered Voltage Output DAC with 2.5V, 4ppm/°C Reference"
U9: "Dual Rail-to-Rail Input/Output, 30V, Wide Voltage Range, High Output Operational Amplifier"
U51_ATTEN3 U51_ATTEN4: "31.5 dB, 0.5 dB Step 6 Bit, Serial Control Interface, Single Positive Supply Voltage"
USBMCU: library part "USB B connector - Through hole"
VR1: library part MC78M05ACDT, "Three-Terminal Medium Current Positive Voltage Regulator"
VR2: "Very low drop 500 ma voltage regulators"
X1: library part "SMT Crystal", "16 MHz Micro SMT Crystal"
X2 X3: library part "ROS-2650 VCO", "Linear Tuning 2165 to 2650 MHz SMT Voltage Controlled Oscillator"

## Free pads (board coordinates)
  round 60 smd: 0(2895,1980)
  round 250 hole 130: 6(5800,4500) 8(1200,700) 8(1200,4500) 9(5800,700)

## Via types
v1: diameter 40, hole 20, Top Layer to Gnd 2, tented both sides, 312 vias
v2: diameter 25, hole 15, Top Layer to Gnd 2, tented both sides, 105 vias
v3: diameter 30, hole 15, Top Layer to Gnd 2, tented both sides, 93 vias
v4: diameter 45, hole 25, Top Layer to Gnd 2, tented both sides, 37 vias
v5: diameter 25, hole 15, Top Layer to Gnd 2, 18 vias
v6: diameter 50, hole 30, Top Layer to Gnd 2, tented both sides, 1 vias
v7: diameter 60, hole 40, Top Layer to Gnd 2, tented both sides, 1 vias

## Nets (pads, with @x,y where several pads share a name; then routed paths per layer and width w, separated by ;. In a path a pad name is that pad's centre, name@x,y a point inside that pad or via, vN(x,y) a via of type N, cw(c..) or ccw(c..) an arc to the next point about the centre after c; other vN are vias at no path point)
3V3: C4.2 C5.2 C6.2 C7.2 C15.2 C16.2 C19.2 C54_ATTEN3.2 C54_ATTEN4.2 C56_ATTEN3.2 C56_ATTEN4.2 CBP2.1 EORE_CONN.5 EORE_CONN.6 ERASE.1 JTAG.1 LED8.1 R2.2 R3.2 R4.2 R6.2 R44.2 RP1.2 RP2.2 U1.1 U1.7 U1.18 U1.45 U1.58 U2.6 U8.5 U8.9 U51_ATTEN3.6 U51_ATTEN3.9 U51_ATTEN3.13 U51_ATTEN4.6 U51_ATTEN4.9 U51_ATTEN4.13 VR2.3 | length 3426.3
  Top Layer w6: U8.5@2680.71,3179.37 v3(2680.71,3226.81)
  Top Layer w7: R6.2@1400,3192.44 v2(1447.44,3192.44) ; R4.2@1400,3312.44 v2(1447.44,3312.44) ; R2.2@1400,3547.56 v2(1447.44,3547.56) ; R3.2@1400,3667.56 v2(1447.44,3667.56) ; LED8.1@1500,847.56 v2(1500,905) ; 5471.57,1287.42 C54_ATTEN3.2@5471.57,1310.44
  Top Layer w8: C7.2@2579.49,1839.49 cw(c2629.01,1789.97) 2629.01,1860 2642.89,1860 ccw(c2642.89,1945.36) 2703.2,1884.96 ccw(c2642.89,1945.36) 2703.24,1885 U1.7@2724.62,1906.37 ; U1.1@2622.67,1971.46 U1.1@2641.1,1989.89 ; U1.18@2944.05,1815 2985.02,1774.03 cw(c2960.86,1749.91) 2995,1749.91 2995,1717.96 cw(c2969.6,1717.96) C16.2@2987.56,1700 ; U51_ATTEN4.6@5160.63,2807.36 5160.63,2789.23 ccw(c5227.58,2789.23) 5180.22,2741.91 ; 5180.24,2741.89 5197.46,2724.67 C54_ATTEN4.2@5206.51,2733.72 ; v2@5197.44,2678.54 C54_ATTEN4.2@5197.44,2725 ; C54_ATTEN4.2@5206.53,2733.74 ccw(c5174.69,2765.53) 5219.69,2765.53 U51_ATTEN4.9@5219.69,2807.36 ; v2@5220,1310.44 C56_ATTEN3.2@5266.46,1310.44 ; U51_ATTEN3.6@5229.63,1393.13 5229.63,1375 ccw(c5296.58,1375) 5249.22,1327.68 ; 5249.24,1327.66 C56_ATTEN3.2@5266.46,1310.44 ; U51_ATTEN4.13@5272.64,2880 5279.45,2880 cw(c5279.45,2843.22) 5305.43,2869.25 5375.8,2798.89 cw(c5311.12,2734.23) C56_ATTEN4.2@5402.57,2734.23 ; C56_ATTEN3.2@5275.51,1319.49 C56_ATTEN3.2@5266.46,1310.44 ; C56_ATTEN3.2@5275.53,1319.51 ccw(c5243.7,1351.3) 5288.69,1351.3 U51_ATTEN3.9@5288.69,1393.13 ; U51_ATTEN3.13@5341.64,1465.77 5348.45,1465.77 cw(c5348.45,1429) 5374.43,1455.03 ; 5374.46,1455 5444.8,1384.66 cw(c5380.12,1320) 5471.57,1320 C54_ATTEN3.2@5471.57,1310.44 v2@5471.57,1263.98 ; v2@5402.56,2678.54 C56_ATTEN4.2@5402.56,2725
  Top Layer w10: v3(2450,3100) 2459.93,3109.93 cw(c2485,3084.86) 2485,3120.31 U8.9@2519.29,3120.31 2560,3120.31 cw(c2560,3087.87) 2592.44,3087.87 C19.2@2592.44,3020 ; v3@2611.39,2019.59 U1.1@2641.1,1989.89 ; C15.2@2639.49,2225.51 cw(c2639.49,2145.26) 2696.23,2202.01 U1.58@2724.62,2173.63 v3(2771.82,2126.42) ; U1.7@2725,1905 2762.2,1942.2 v3(2762.2,1962.2) ; v3(2916.83,1842.22) U1.18@2985.02,1774.03 ; v3(2954.66,2199.94) 2954.66,2219.94 U1.45@2991.87,2257.14 3051.51,2316.78 cw(c3060.51,2307.78) C6.2@3060.51,2320.51 ; RP1.2@3900,1772.44 v3@3952.01,1772.44 ; RP2.2@3900,1967.56 v3@3952.01,1967.56
  Top Layer w15: v4(3420.41,4146.39) CBP2.1@3500,4225.98 ; v4(3500,4107.44) CBP2.1@3500,4220 ; v4(3579.59,4146.39) CBP2.1@3500,4225.98 ; v4(3612.56,4225.98) CBP2.1@3500,4225.98
  Top Layer w20: v6(1773.15,1442.56) R44.2@1773.15,1520
  Top Layer w30: VR2.3@3117.17,4229.76 3496.22,4229.76 cw(c3496.22,4225.98) CBP2.1@3500,4225.98
  other v2: 2130,573 2130,703 2130,855 2130,985 5472.02,1268.98 5225,1310 5197.88,2683.54 5403,2683.54
  other v3: 3952.01,1771.34 3952.01,1966.46 2612.17,2020.37
  other v4: 4535,1810 4535,1860
5V0: CB6.1 J6.3 POWER.4 VR2.1 | length 2352.4
  Top Layer w40: J6.3@2780,3690 ccw(c2780,3994.15) 2995.07,3779.08 CB6.1@3065.98,3850 ccw(c2942.42,3973.56) 3117.17,3973.56 ; 3117.17,3923.56 VR2.1@3117.17,4050.24 3135,4050.24 ccw(c3135,4100.24) 3185,4100.24 v7(3185,4145)
  Power w40: POWER.4@1757,3845 cw(c2481.26,3120.74) 1914.04,3973.6 cw(c2481.26,3120.74) 2481.26,4145 ; 2381.26,4145 v7(3185,4145)
12V+: CB7.1 J6.1 VR1.3 | length 571
  Top Layer w35: VR1.3@2222.83,4050.24 2222.83,3973.56 ccw(c2397.58,3973.56) CB7.1@2274.02,3850 2330.79,3793.23 ccw(c2580,4042.44) J6.1@2580,3690
\SYNC: U1.16 U8.6 | length 2634.2
  Top Layer w6: 2442.76,2907.24 cw(c2630.56,3095) 2365,3095 cw(c2449.37,3095) 2449.37,3179.37 U8.6@2519.29,3179.37 ; 2442.78,2907.22 2546.06,2803.94 ccw(c2809.07,3066.96) 2546.12,2803.88 ccw(c2809.07,3066.96) 2809.07,2695 cw(c2809.07,2195) 3162.62,2548.55 cw(c2963.75,2349.68) 3162.68,2548.5 3169.92,2541.25 cw(c2988.67,2360) 3245,2360 v3(3245,2325) ; v3(2840,1675) cw(c2888.28,1723.28) 2820,1723.28 2820,1735 cw(c2859.13,1735) 2831.46,1762.67 U1.16@2849.89,1781.1
  Power w6: v3(2840,1675) ccw(c2900.36,1735.36) 2900.36,1650 3105,1650 ccw(c3105,1780) 3181.9,1675.18 ccw(c3105,1780) 3209.82,1703.1 ccw(c3105,1780) 3235,1780 3235,2277.93 cw(c3252.07,2277.93) 3240,2290 ccw(c3227.93,2302.07) 3245,2302.07 v3(3245,2325)
CLOCK: LC2.3 TP4.1 U1.21 U51_ATTEN3.4 U51_ATTEN4.4 | length 5625.5
  Top Layer w6: LC2.3@2793.78,1483.31 cw(c2894.43,1382.65) 2894.43,1525 2973.79,1525 ccw(c2973.79,1576.21) v3(3010,1540) 3016.36,1546.36 ccw(c2862.72,1700) 3080,1700 ccw(c2928.96,1700) 3035.77,1806.8 U1.21@3005.79,1836.78 ; v3(3365,1475) 3690.65,1475 cw(c3690.65,1150.65) TP4.1@3920,1380 3978.55,1321.45 ccw(c4332.11,1675) 4332.11,1175 5035,1175 ccw(c5035,1300) 5160,1300 5160,1425 cw(c5181.09,1425) 5181.09,1446.09 U51_ATTEN3.4@5196.36,1446.09 ; v3(4090,1965) cw(c4135,1965) 4135,2010 4140,2010 ccw(c4140,2090) 4220,2090 4220,2120 cw(c4260,2120) 4260,2160 5105,2160 ccw(c5105,2225) 5170,2225 5170,2451.36 ccw(c5016.36,2451.36) 5125,2560 cw(c5197.39,2632.39) 5095.02,2632.39 5095.02,2844.23 cw(c5111.1,2844.23) 5096.66,2851.31 cw(c5111.1,2844.23) 5104.02,2858.67 cw(c5111.1,2844.23) 5111.1,2860.32 U51_ATTEN4.4@5127.36,2860.32
  Power w6: v3(3010,1540) ccw(c3166.92,1696.92) 3166.92,1475 v3(3365,1475) ; TP4.1@3920,1380 ccw(c3811.36,1488.64) 3965,1488.64 3965,1559.29 cw(c4135.71,1559.29) 4015,1680 ccw(c3918.43,1776.57) 4055,1776.57 4055,1880.5 cw(c4174.5,1880.5) v3(4090,1965)
CS_1: LC4.1 U1.6 | length 803.4
  Top Layer w6: LC4.1@2073.78,1483.31 2403.63,1813.16 cw(c2565,1651.79) 2468.64,1858.66 cw(c2565,1651.79) 2565,1880 2625,1880 ccw(c2625,1989.61) 2702.47,1912.07 ccw(c2625,1989.61) 2702.51,1912.1 U1.6@2710.7,1920.29
CS_2: LC5.3 U1.9 | length 731
  Top Layer w6: LC5.3@2173.78,1483.41 LC5.3@2173.78,1483.31 cw(c2334.79,1322.3) 2192.59,1500.14 2216.4,1523.95 cw(c2400,1340.35) 2400,1600 ccw(c2400,1829.35) 2562.15,1667.15 ; 2562.18,1667.18 2692.55,1797.55 ccw(c2674.55,1815.54) 2700,1815.54 cw(c2725.45,1815.54) 2707.45,1833.53 U1.9@2752.45,1878.53
CS_3: LC3.1 U1.10 | length 610
  Top Layer w6: LC3.1@2313.78,1483.31 2382.52,1552.05 cw(c2450,1484.57) 2450,1580 ccw(c2450,1700.71) 2535.33,1615.33 2712.93,1792.93 ccw(c2695.86,1810) 2720,1810 cw(c2739.9,1810) 2725.81,1824.06 ; 2725.83,1824.07 U1.10@2766.37,1864.62
CS_4: LC6.3 U1.13 | length 559.3
  Top Layer w6: LC6.3@2414.39,1484.8 ccw(c2415.89,1483.31) LC6.3@2413.78,1483.31 2443.38,1512.91 cw(c2545,1411.28) 2545,1555 ccw(c2545,1723.99) 2664.5,1604.5 2730,1670 ccw(c2645.5,1754.5) 2765,1754.5 2765,1755 cw(c2824.69,1755) 2782.48,1797.21 U1.13@2808.13,1822.86
CS_5: LC7.1 U1.19 | length 710.5
  Top Layer w6: LC7.1@2553.78,1483.78 cw(c2774.01,1263.55) 2618.26,1533.26 cw(c2774.01,1263.55) 2774.01,1575 2914.12,1575 ccw(c2914.12,1700.09) 3039.2,1700.09 ccw(c2924.29,1700.09) 3005.55,1781.34 U1.19@2977.95,1808.94
CS_6: LC1.3 U1.20 | length 654.6
  Top Layer w6: LC1.3@2653.78,1483.31 cw(c2814.79,1322.3) 2814.79,1550 2909.67,1550 ccw(c2909.67,1700.02) 3059.69,1700.02 ccw(c2926.86,1700.02) 3020.83,1793.9 ccw(c2926.86,1700.02) 3020.79,1793.94 U1.20@2991.87,1822.86
CS_7: U1.29 U51_ATTEN3.5 | length 2504
  Top Layer w6: U1.29@3117.14,1948.13 3288.29,1776.98 ccw(c3450,1938.69) 3450,1710 3592.89,1710 cw(c3592.89,1210) 3712.12,1695.58 cw(c3592.89,1210) 3856.28,1635 cw(c3592.89,1210) 3946.45,1563.55 4118.55,1391.45 ccw(c4472.11,1745) 4472.11,1245 v2(5040,1245) ; v2@5196.36,1240 U51_ATTEN3.5@5196.36,1426.4
  Power w6: v2(5040,1245) v2(5196.36,1245)
CS_8: U1.34 U51_ATTEN4.5 | length 2493.2
  Top Layer w6: U1.34@3144.98,2104.03 3187.54,2146.59 cw(c3256.14,2077.99) 3256.14,2175 v3(3340,2175) ; v3(3520,2210) 4870,2210 ccw(c4870,2260) 4920,2260 4920,2293.61 cw(c5302.06,2293.61) v2(5031.9,2563.77) ; v2@5127.36,2654.23 U51_ATTEN4.5@5127.36,2840.63
  Power w6: v3(3340,2175) 3383.79,2175 ccw(c3383.79,2226.21) 3420,2190 cw(c3468.28,2141.72) 3468.28,2210 v3(3520,2210) ; v2(5031.9,2563.77) v2(5127.36,2659.23)
DATA: LC8.1 R57_ATTEN3.2 R57_ATTEN4.2 TP3.1 U1.22 | length 5161.7
  Top Layer w6: LC8.1@2893.78,1483.31 2960,1483.31 ccw(c2960,1612) 3051,1521 v3(3070,1540) ccw(c2985.5,1624.5) 3105,1624.5 3105,1700 ccw(c2947.1,1700) 3058.78,1811.62 ; U1.22@3019.71,1850.7 3058.75,1811.65 ; v3(3365,1540) ccw(c3449.5,1624.5) 3449.5,1505 TP3.1@3895,1505 4048.55,1351.45 ccw(c4402.11,1705) 4114.23,1296.19 ccw(c4402.11,1705) 4402.11,1205 5040,1205 ccw(c5040,1290) 5125,1290 R57_ATTEN3.2@5125,1357.44 ; v3(4020,1965) cw(c4095,1965) 4095,2040 4140,2040 ccw(c4140,2095) 4195,2095 4195,2125 cw(c4255,2125) 4255,2185 5080,2185 ccw(c5080,2245) 5140,2245 5140,2440.5 ccw(c5020.5,2440.5) 5105,2525 cw(c5213.64,2633.64) 5060,2633.64 R57_ATTEN4.2@5060,2772.44
  Power w6: v3(3070,1540) v3(3365,1540) ; TP3.1@3895,1505 cw(c4155.71,1505) 3971.36,1689.35 3977.61,1695.6 ccw(c3875.28,1797.93) 4012.71,1752.59 ccw(c3875.28,1797.93) 4020,1797.93 v3(4020,1965)
DIN: U1.14 U8.8 | length 2833.6
  Top Layer w6: U8.8@2519.29,3140 2450,3140 ccw(c2450,3095) 2405,3095 ccw(c2598.14,3095) 2461.57,2958.43 2576.21,2843.79 ccw(c2838.86,3106.45) 2838.86,2735 cw(c2838.86,2235) 3192.41,2588.55 3240.07,2540.89 cw(c3059.18,2360) 3315,2360 v3(3315,2325) ; v3(2745,1630) ccw(c2660.5,1714.5) 2780,1714.5 2780,1730 cw(c2869.05,1730) 2806.08,1792.97 U1.14@2822.05,1808.94
  Power w6: v3(2745,1630) ccw(c2793.28,1678.28) 2793.28,1610 3110,1610 ccw(c3110,1775) 3199.97,1636.69 ccw(c3110,1775) 3248.31,1685.03 ccw(c3110,1775) 3275,1775 3275,2212.59 cw(c3372.14,2212.59) 3303.45,2281.28 ccw(c3275.57,2309.16) 3315,2309.16 v3(3315,2325)